# Altium PCB OUR_CIU.PcbDoc (part 1 of 2)
Units mil, origin at the board's own origin, x right, y up, seen from the top; angles counter-clockwise.
Board outline 2638.36 x 2031.63 mil, 4 copper layers (Signal, Top Ground, Power, Bottom Ground), stack 23.756 mil thick; 81 components, 38 nets, 261 pads, 83 vias.
Unrouted connection lines stored in the file: 31.
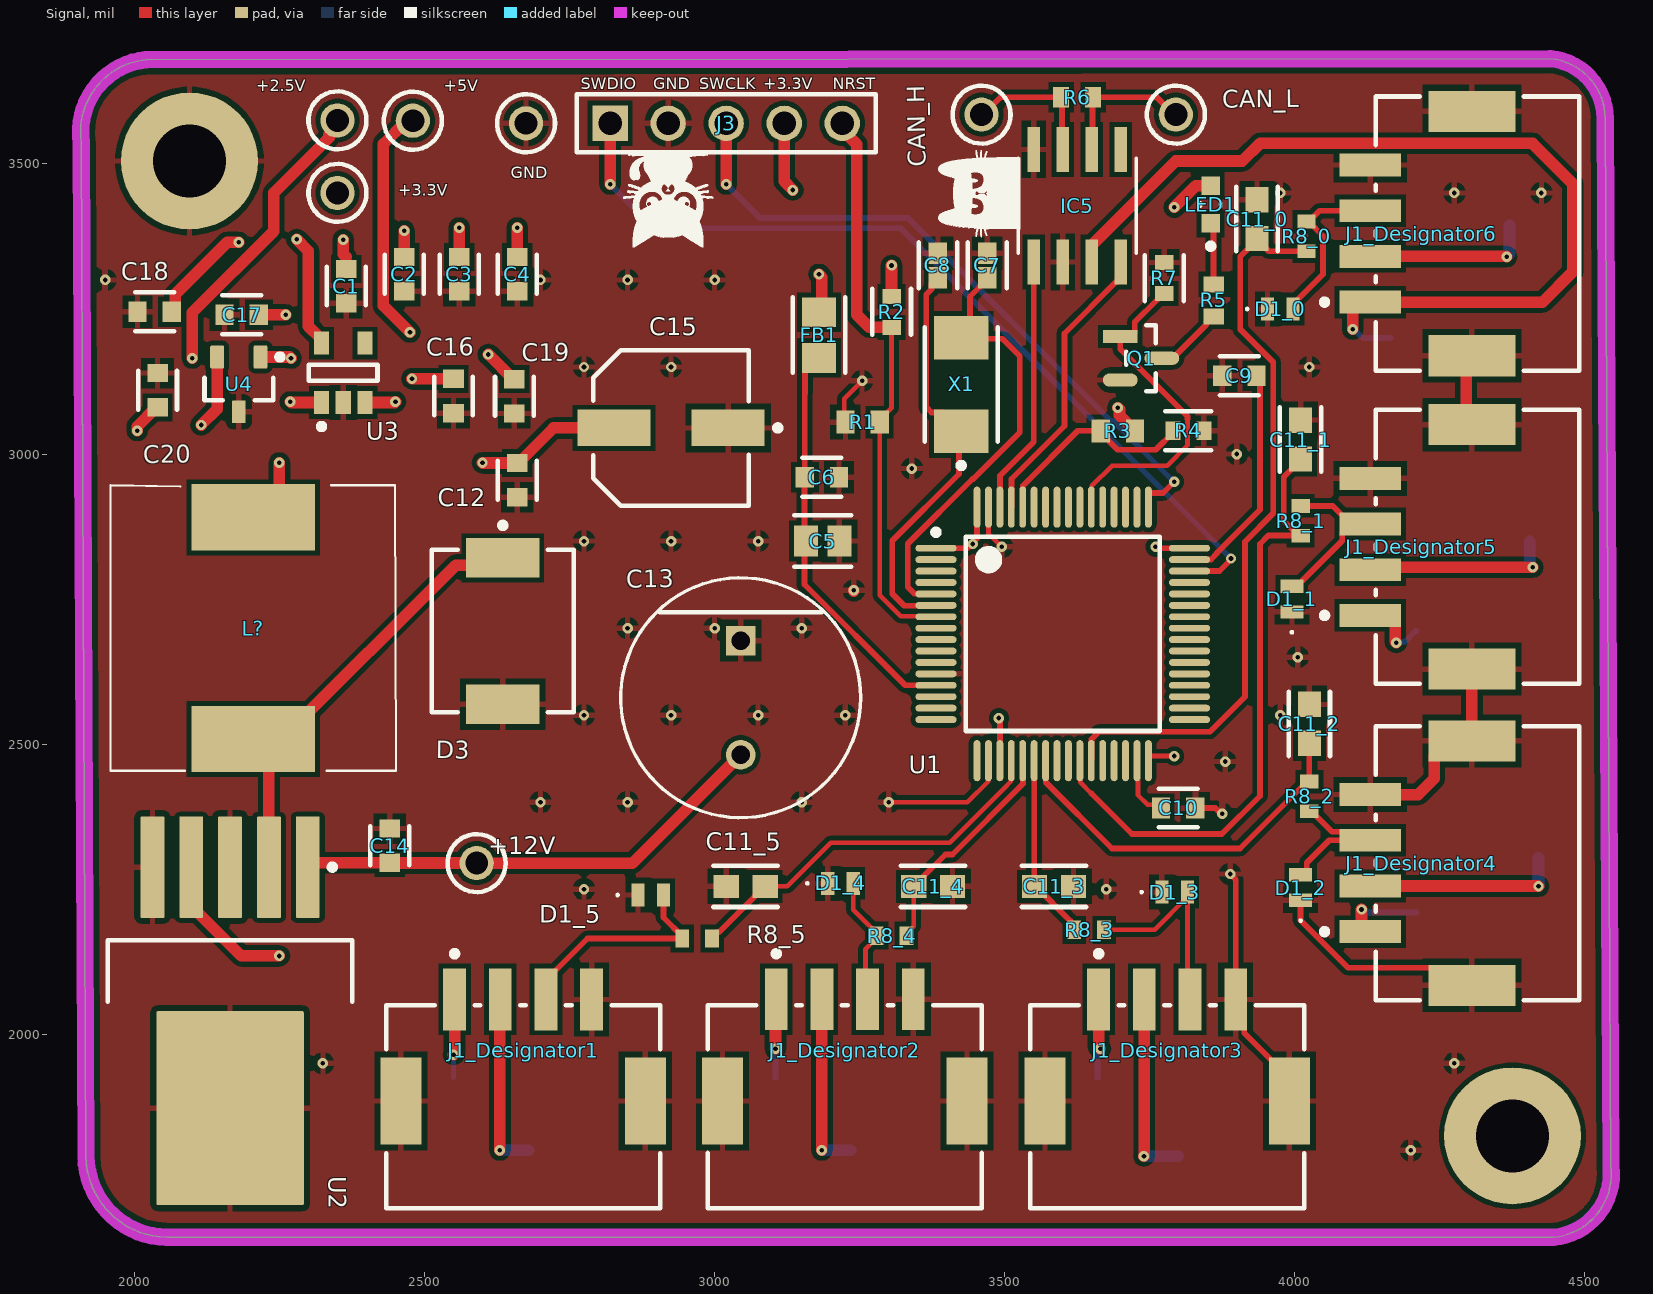
[diagram p0: Signal view]
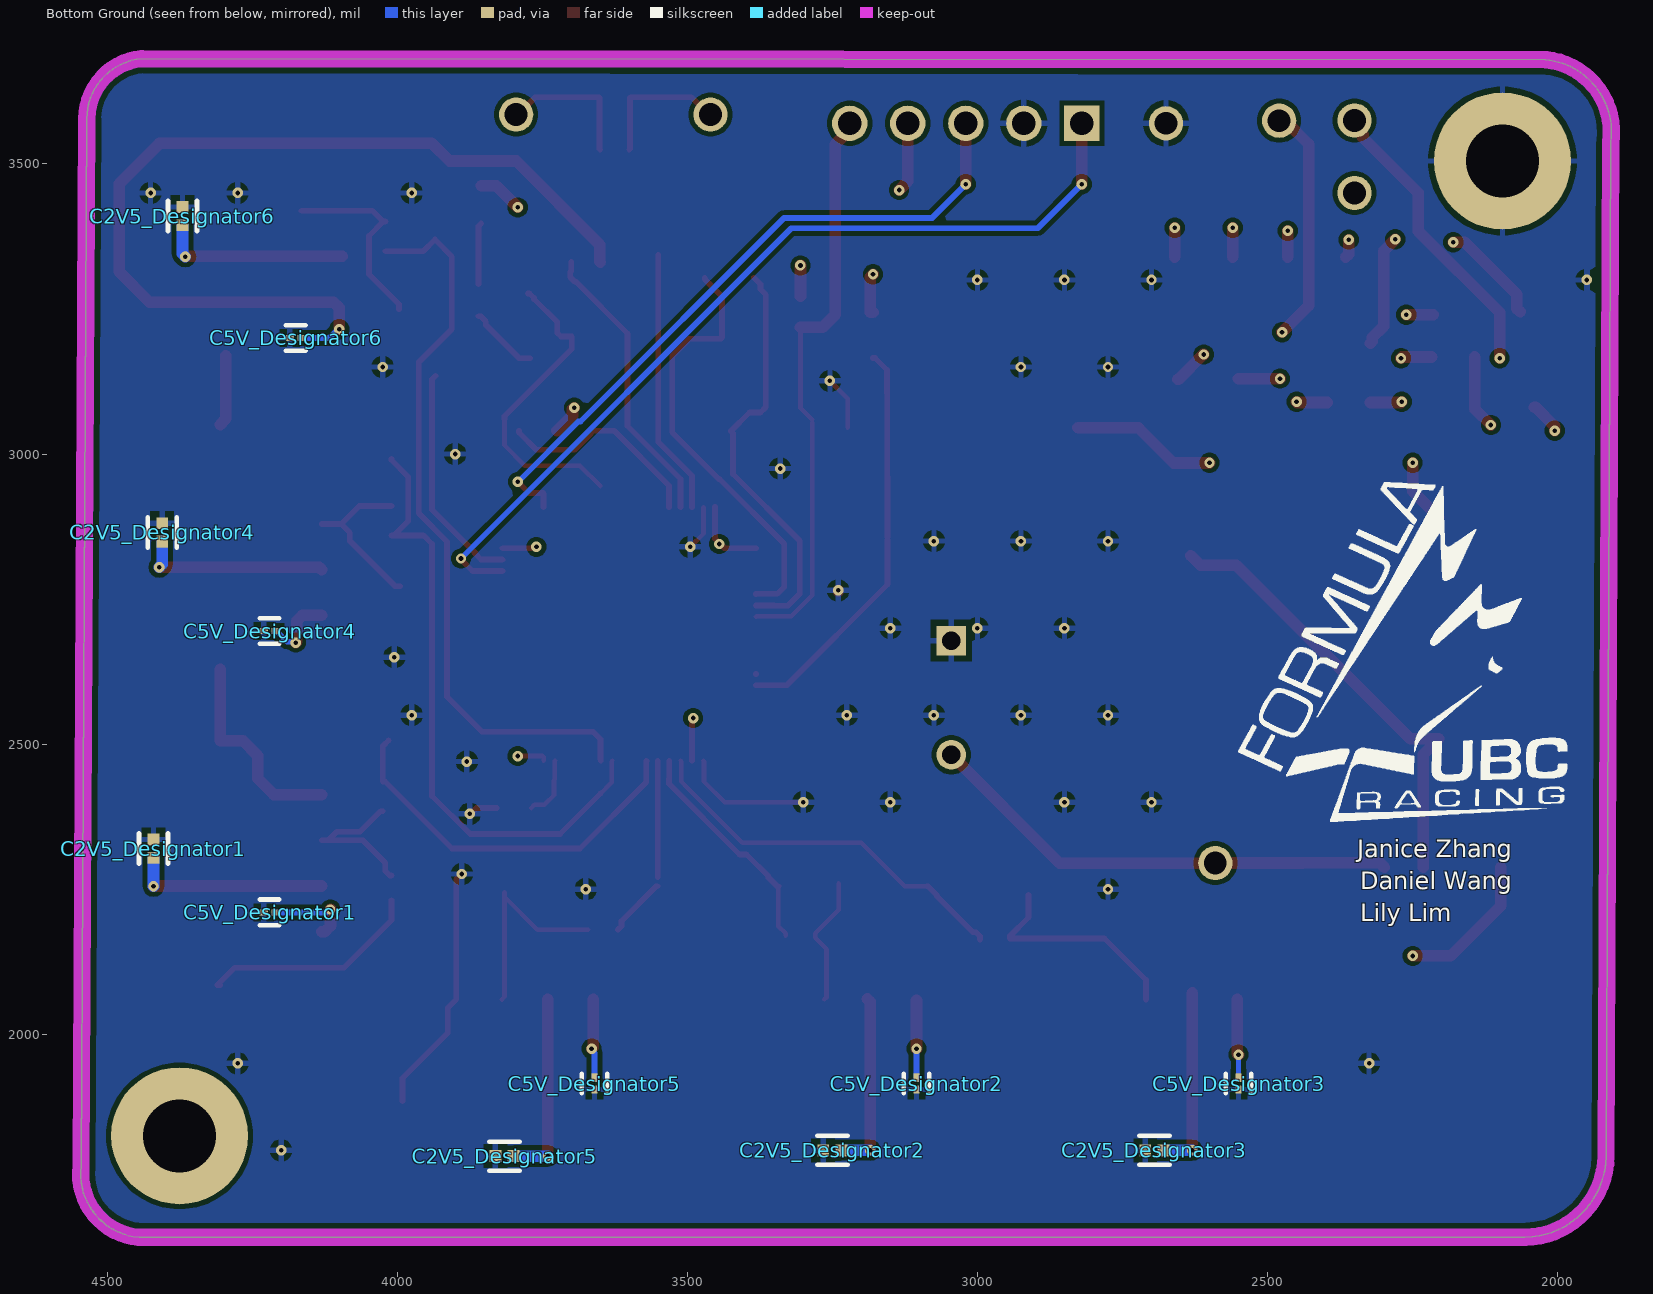
[diagram p1: Bottom Ground view, seen from below]
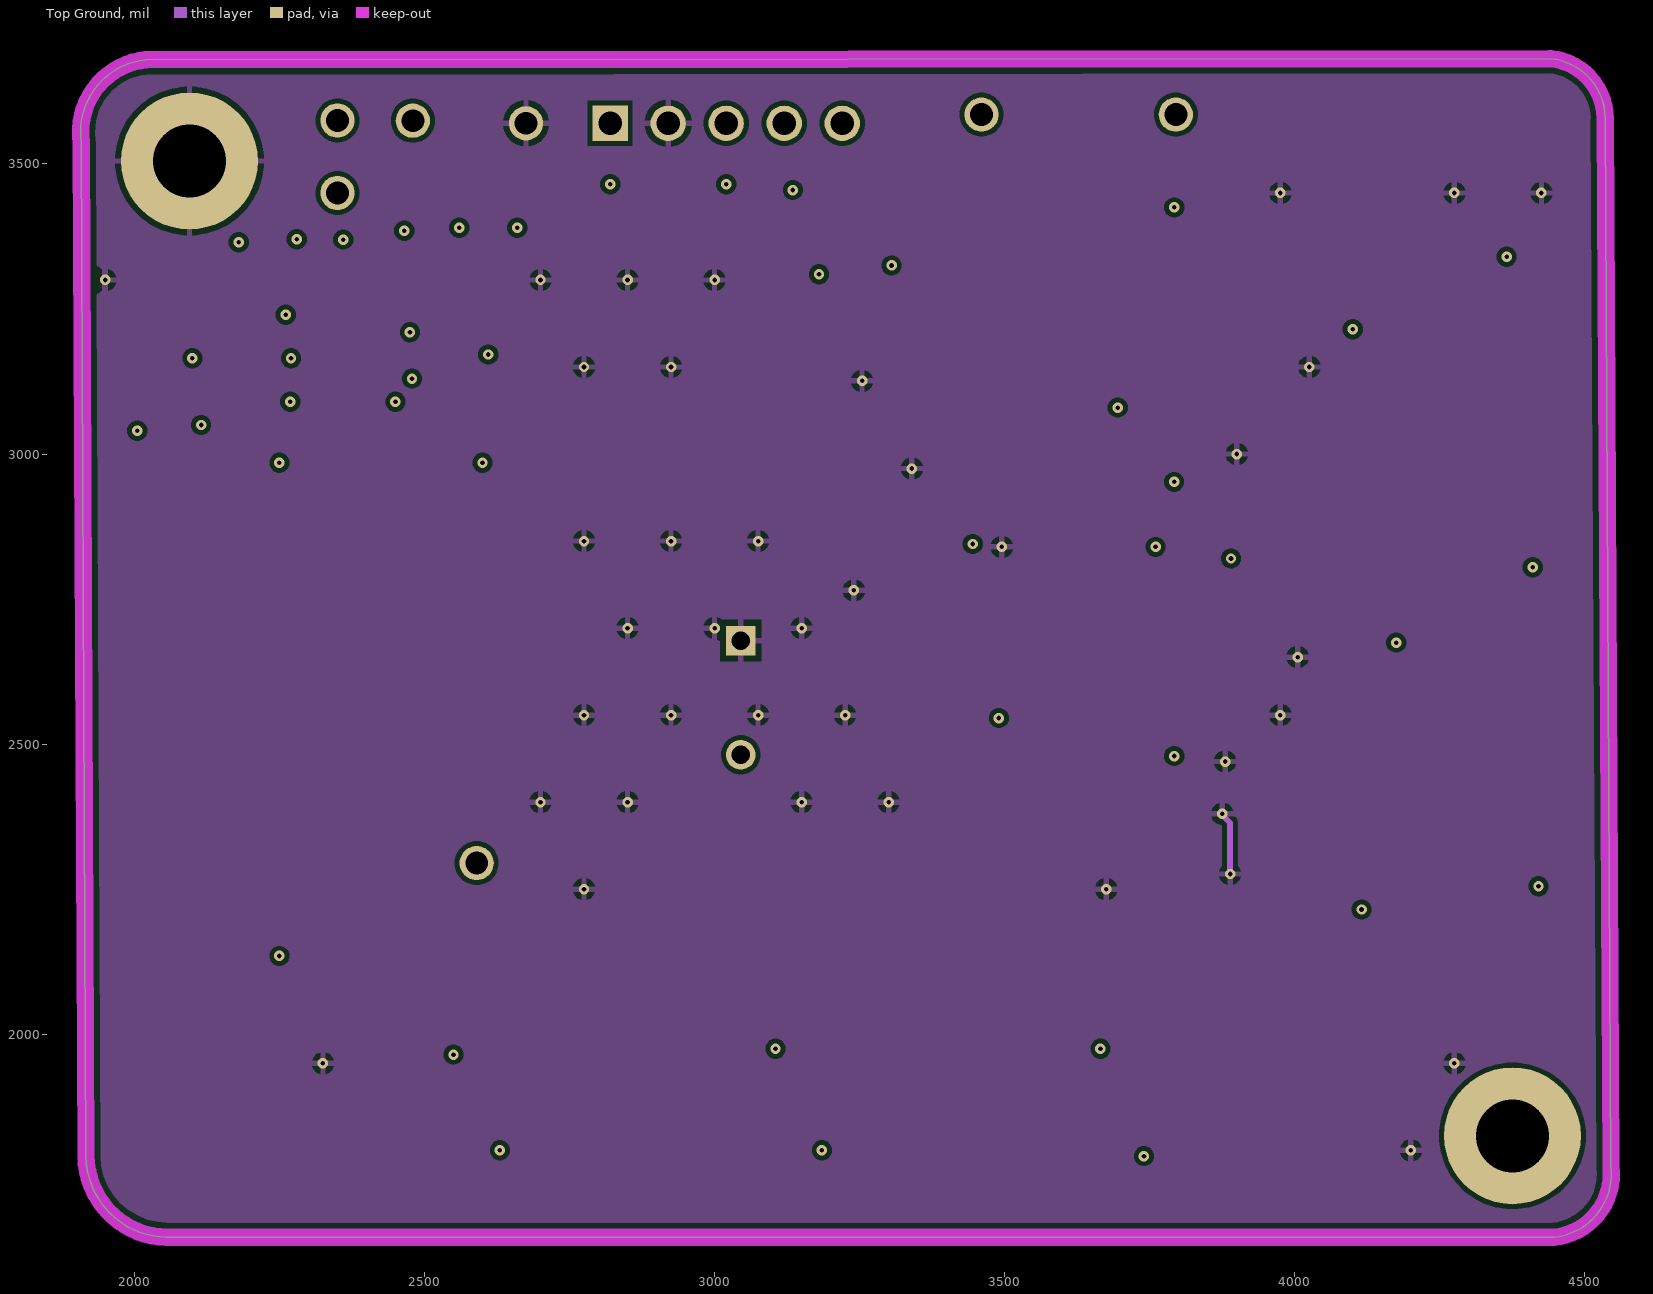
[diagram p2: Top Ground]
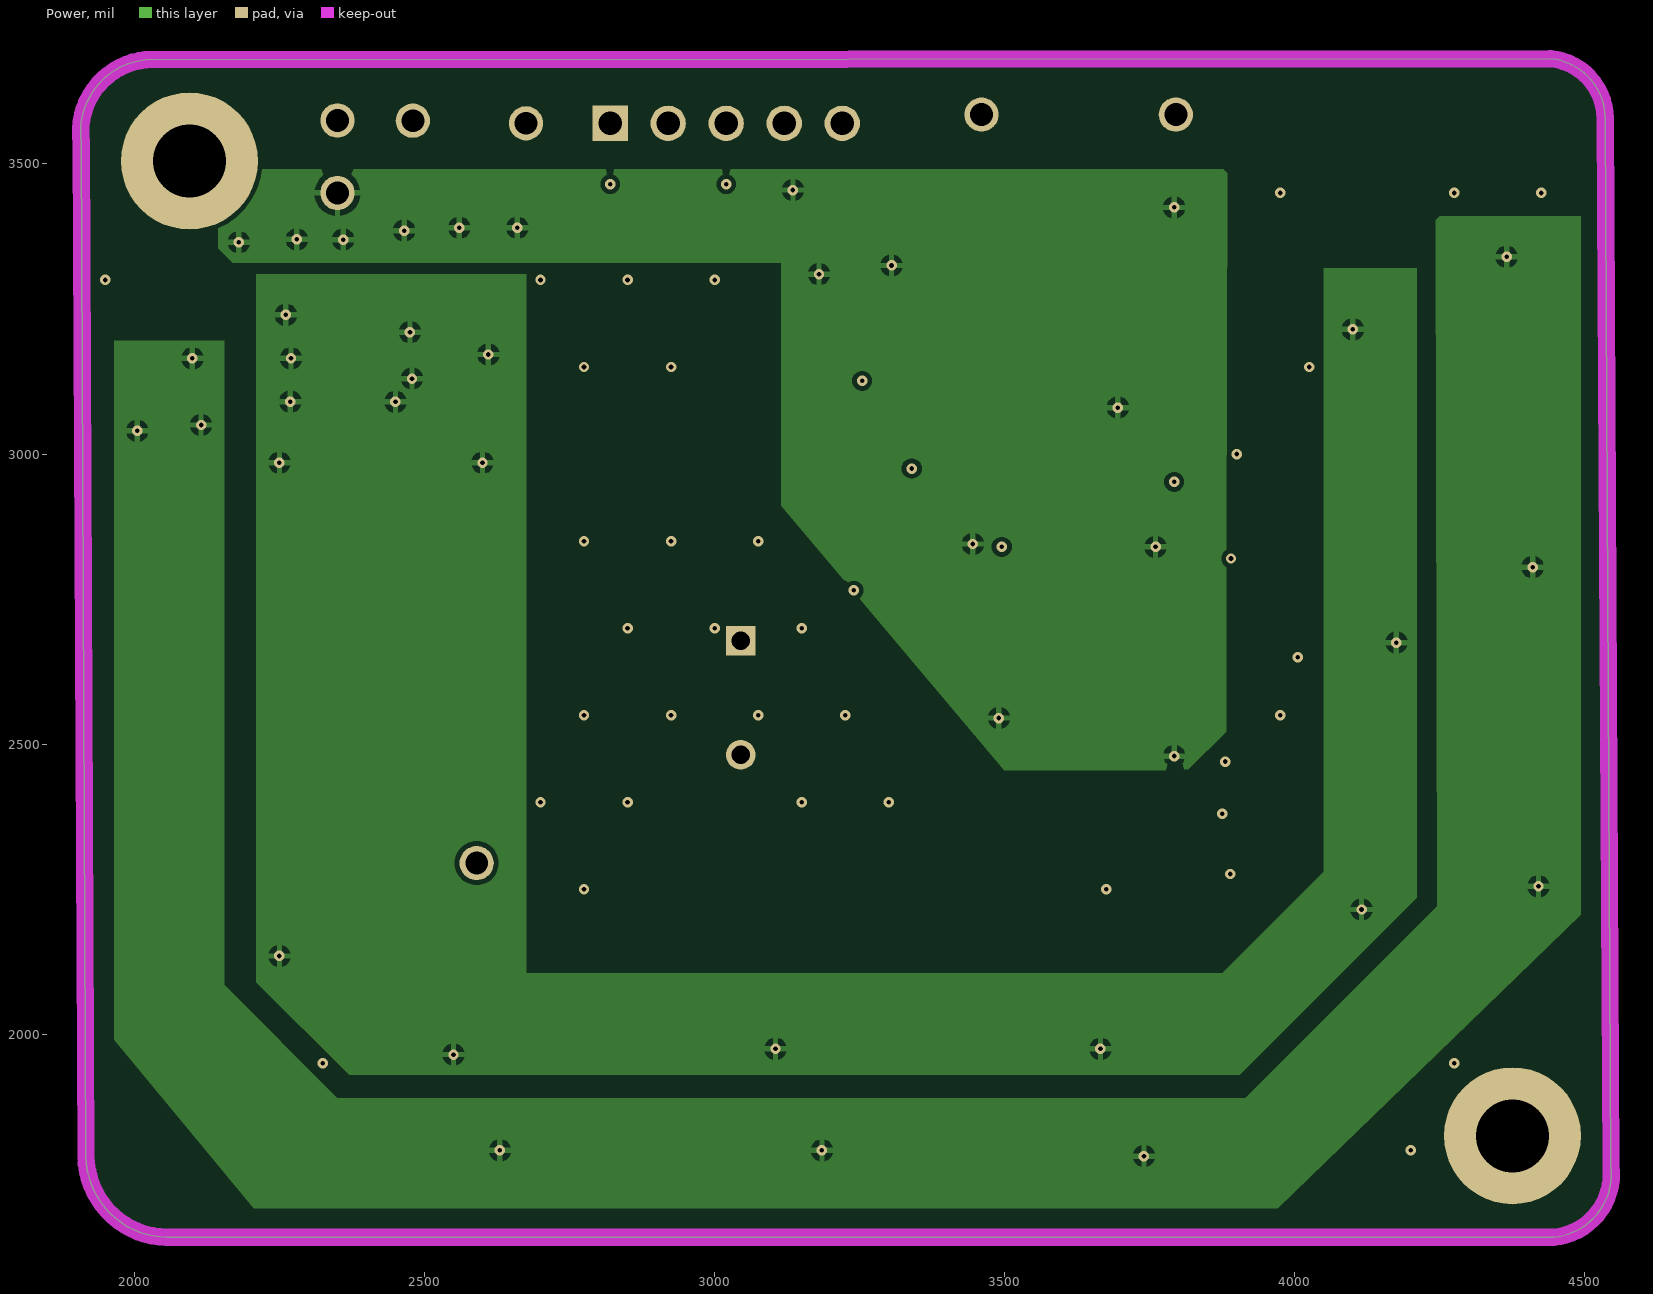
[diagram p3: Power]
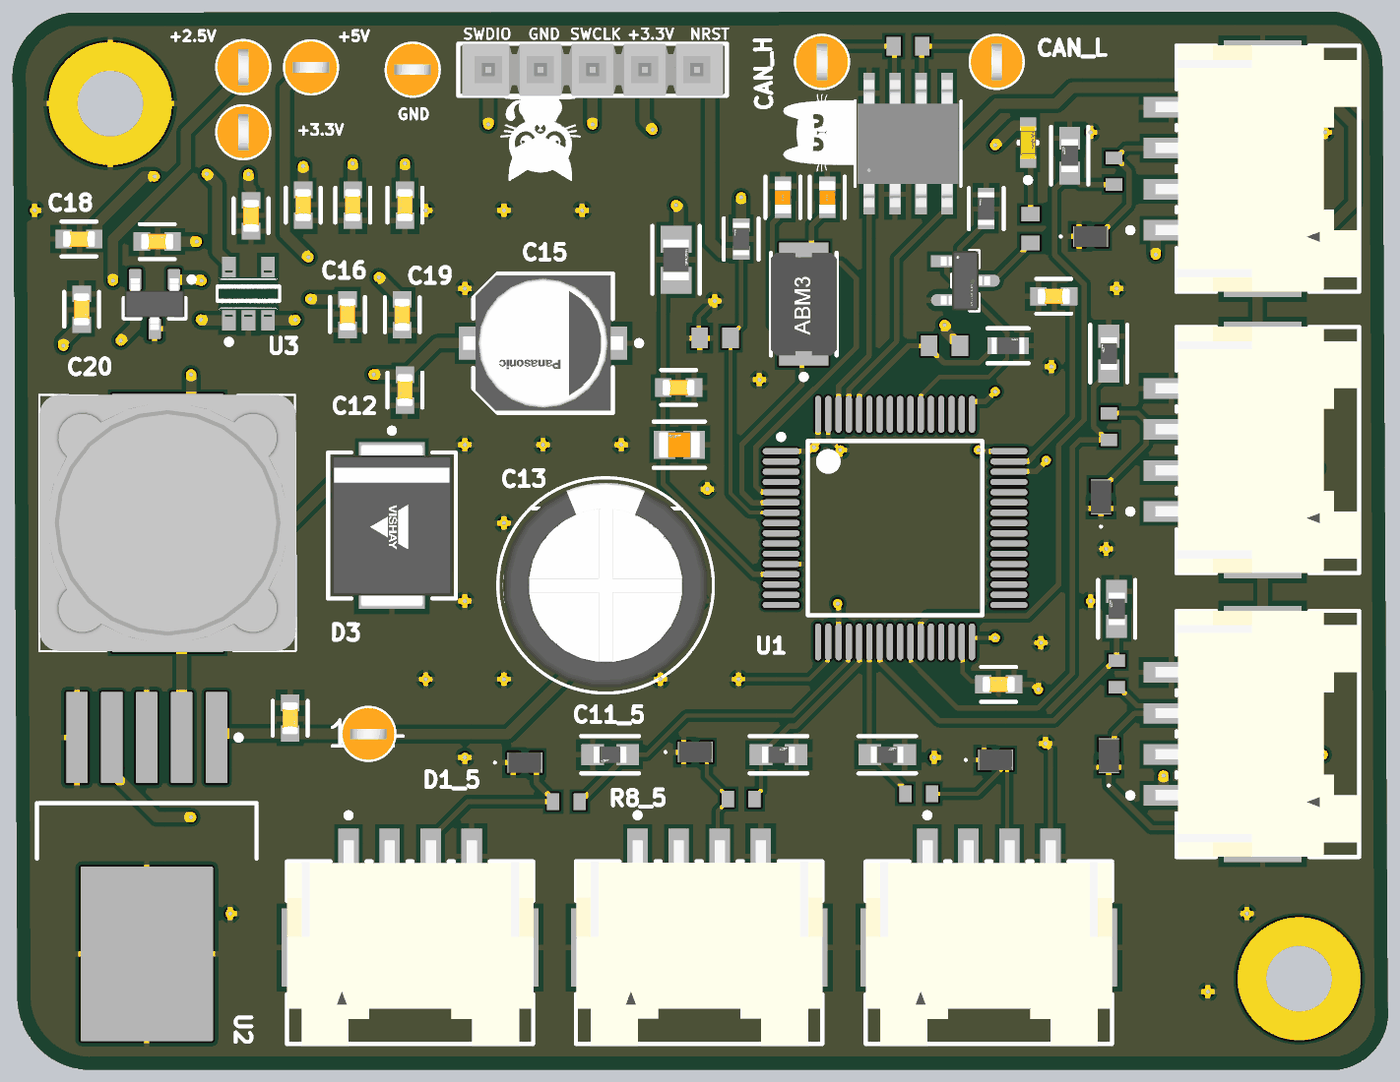
[diagram p4: 3D render of the assembled board from above, using the file's embedded part models]
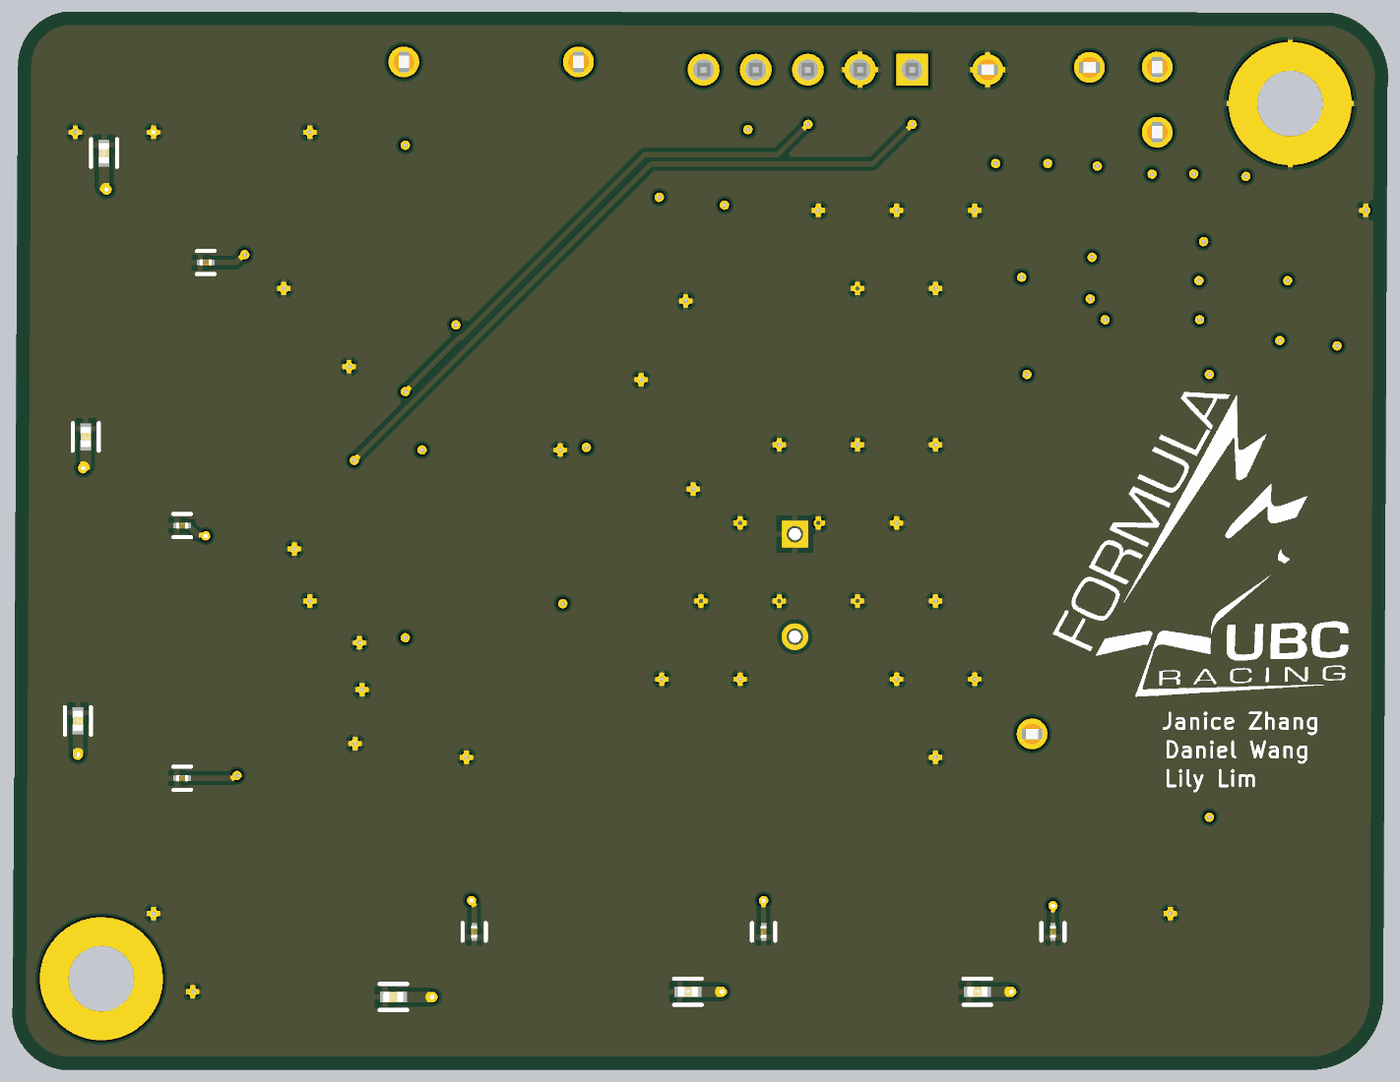
[diagram p5: 3D render of the assembled board from below, using the file's embedded part models]

## Layer stack, top to bottom
Top Solder: solder mask 0.4, Solder Resist, Dk 3.5
Signal: signal copper 1.378
Dielectric 2: prepreg 2.8, PP-006, Dk 4.1
Top Ground: signal copper 1.4
Dielectric 1: dielectric 12.6, FR-4, Dk 4.8
Power: signal copper 1.4
Dielectric 3: prepreg 2.8, PP-006, Dk 4.1
Bottom Ground: signal copper 1.378
Bottom Solder: solder mask 0.4, Solder Resist, Dk 3.5

## Board outline
1916.66,1789.42 ccw(c2058.37,1791.64) 2056.15,1649.94 4445.7,1649.94 ccw(c4435.59,1759.58) 4544.91,1772.68 4534.95,3578.28 ccw(c4430.63,3577.71) 4440.43,3681.57 2020,3679.5 ccw(c2032.49,3554.83) 1908.56,3536.44

## Design rules (kind name [scope] priority, off if disabled: settings)
AssemblyTestPointUsage [All] p1: isadvanced=TRUE
AssemblyTestpoint [All] p1: isadvanced=TRUE testpointundercomponent=TRUE minsize=40 maxsize=100 preferedsize=60 minholesize=0 maxholesize=40 preferedholesize=32 testpointgrid=1 usegrid=TRUE gridtolerance=0.01 allowsidetop=TRUE allowsidebottom=TRUE
BoardOutlineClearance BoardOutlineClearance_1 [All] p1: isadvanced=TRUE gap=9 ignorepadtopadclearanceinfootprint=FALSE
Clearance Clearance_1 [(ExistsOnLayer('Top Ground') Or ExistsOnLayer('Power')) vs (ExistsOnLayer('Top Ground') Or ExistsOnLayer('Power'))] p1: gap=8 ignorepadtopadclearanceinfootprint=FALSE except(5: SMDPad-SMDPad; 10: Arc-THPad Arc-Via Track-THPad Track-Via THPad-Text Via-Text; 20: SMDPad-THPad THPad-THPad) sourcerule=43 cellrowname=All cellrowtype=0 cellcolname=All cellcoltype=0 innerlayers=TRUE
Clearance Clearance_2 [(ExistsOnLayer('Signal') Or ExistsOnLayer('Bottom Ground')) vs (ExistsOnLayer('Signal') Or ExistsOnLayer('Bottom Ground'))] p2: gap=8 ignorepadtopadclearanceinfootprint=FALSE except(5: SMDPad-SMDPad; 10: Arc-THPad Arc-Via Track-THPad Track-Via THPad-Text Via-Text; 20: SMDPad-THPad THPad-THPad) sourcerule=43 cellrowname=All cellrowtype=0 cellcolname=All cellcoltype=0 outerlayers=TRUE
Clearance [All] p3: gap=10 ignorepadtopadclearanceinfootprint=FALSE ismatrix=TRUE
ComponentClearance [All] p1: isadvanced=TRUE gap=10 collisioncheckmode=3 verticalgap=10 showdistances=FALSE
FabricationTestPointUsage [All] p1: isadvanced=TRUE valid=0 allowmultiple=FALSE
FabricationTestpoint [All] p1: isadvanced=TRUE side=3 testpointundercomponent=TRUE minsize=40 maxsize=100 preferedsize=60 minholesize=0 maxholesize=40 preferedholesize=32 testpointgrid=1 allowsidetop=TRUE allowsidebottom=TRUE usegrid=TRUE gridtolerance=0.01
FanoutControl Fanout_BGA [IsBGA] p1: isadvanced=TRUE bgadir=Out bgaviamode=Centered fanoutstyle=Auto fanoutdirection=Alternating viagrid=1 // Fanout_BGA (Default Rule)
FanoutControl Fanout_LCC [IsLCC] p2: isadvanced=TRUE bgadir=Out bgaviamode=Centered fanoutstyle=Auto fanoutdirection=Alternating viagrid=1 // Fanout_LCC (Default Rule)
FanoutControl Fanout_SOIC [IsSOIC] p3: isadvanced=TRUE bgadir=Out bgaviamode=Centered fanoutstyle=Auto fanoutdirection=Alternating viagrid=1 // Fanout_SOIC (Default Rule)
FanoutControl Fanout_Small [(CompPinCount < 5)] p4: isadvanced=TRUE bgadir=Out bgaviamode=Centered fanoutstyle=Auto fanoutdirection=OutThenIn viagrid=1 // Fanout_Small (Default Rule)
FanoutControl Fanout_Default [All] p5: isadvanced=TRUE bgadir=Out bgaviamode=Centered fanoutstyle=Auto fanoutdirection=Alternating viagrid=1 // Fanout_Default (Default Rule)
Height [All] p1: isadvanced=TRUE minheight=0 maxheight=1000 prefheight=500
HoleSize [All] p1: isadvanced=TRUE absolutevalues=TRUE maxlimit=200 minlimit=1 maxpercent=80.000 minpercent=20.000
HoleToHoleClearance [All] p1: isadvanced=TRUE gap=10 allowstackedmicrovias=TRUE
LayerPairs [All] p1: isadvanced=TRUE enforce=TRUE
MinimumSolderMaskSliver [All] p1: isadvanced=TRUE minsoldermaskwidth=5
NetAntennae [All] p1: isadvanced=TRUE netantennaetolerance=0
PasteMaskExpansion [All] p1: isadvanced=TRUE expansion=0
PlaneClearance [All] p1: isadvanced=TRUE clearance=20
PlaneConnect [All] p1: isadvanced=TRUE planeconnectstyle=Relief reliefexpansion=20 reliefentries=4 reliefconductorwidth=10 reliefairgap=10
PolygonConnect [All] p1: connectstyle=Relief reliefconductorwidth=10 reliefentries=4 polygonreliefangle="90 Angle" airgapwidth=10
RoutingCorners [All] p1: isadvanced=TRUE cornerstyle=45-Degree minsetback=100 maxsetback=100
RoutingPriority [All] p1: isadvanced=TRUE routingpriority=0
RoutingVias [All] p1: holewidth=8 width=18 viastyle="Through Hole" minholewidth=8 minwidth=18 maxholewidth=28 maxwidth=50
ShortCircuit [All] p1: isadvanced=TRUE allowed=FALSE
SilkToSilkClearance [All] p1: isadvanced=TRUE silktosilkclearance=10
SilkToSolderMaskClearance [IsPad] p1: isadvanced=TRUE minsilkscreentomaskgap=10 clearancetoexposedcopper=TRUE
SolderMaskExpansion [All] p1: isadvanced=TRUE expansion=4 istentingtop=FALSE
SupplyNets "Schematic Supply Nets_5" [InNet('D+12V')] p1: isadvanced=TRUE voltage=0.000
SupplyNets "Schematic Supply Nets_4" [InNet('+2V5')] p2: isadvanced=TRUE voltage=0.000
SupplyNets "Schematic Supply Nets_3" [InNet('+5')] p3: isadvanced=TRUE voltage=0.000
SupplyNets "Schematic Supply Nets_1" [InNet('D+3.3V')] p4: isadvanced=TRUE voltage=0.000
SupplyNets "Schematic Supply Nets" [InNet('GND')] p5: isadvanced=TRUE voltage=0.000
UnRoutedNet [All] p1: isadvanced=TRUE
UnpouredPolygon [All] p1: isadvanced=TRUE
Width MaxMinWidth_1 [All] p1: isadvanced=TRUE maxlimit=20 minlimit=8 preferedwidth=10 midlayer1_minwidth=10 midlayer1_maxwidth=10 midlayer2_minwidth=10 midlayer2_maxwidth=10 minimp=50.000000 maximp=50.000000 favimp=50.000000
Width [All] p2 off: maxlimit=40 minlimit=10 preferedwidth=10 minimp=50.000000 maximp=50.000000 favimp=50.000000
4 further rules are at their usual default settings.

## Classes and differential pairs
channel class Connectors: Designator1 Designator2 Designator3 Designator4 Designator5 Designator6
component class Designator: +2.5V +3.3V +5V +12V C13 C14 C15 C16 C17 C18 C19 C20 D3 GND L? U2 U3 U4
component class Designator6: C2V5_Designator6 C5V_Designator6 J1_Designator6
component class Designator5: C2V5_Designator5 C5V_Designator5 J1_Designator5
component class Designator4: C2V5_Designator4 C5V_Designator4 J1_Designator4
component class Designator3: C2V5_Designator3 C5V_Designator3 J1_Designator3
component class Designator2: C2V5_Designator2 C5V_Designator2 J1_Designator2
component class Designator1: C2V5_Designator1 C5V_Designator1 J1_Designator1
channel class Input_Conditioner: 0 1 2 3 4 5
component class STlink: D5 J3
component class MCU: C1 C2 C3 C4 C5 C6 C7 C8 C9 C10 FB1 LED1 LED3 Q1 R1 R2 R3 R4 R5 R7 U1 X1
component class Can_Interface: C12 CAN_H CAN_L IC5 R6 R24
component class 5: C11_5 D1_5 D3_5 R8_5
component class 4: C11_4 D1_4 D3_4 R8_4
component class 3: C11_3 D1_3 D3_3 R8_3
component class 2: C11_2 D1_2 D3_2 R8_2
component class 1: C11_1 D1_1 D3_1 R8_1
component class 0: C11_0 D1_0 D3_0 R8_0

## Components (designator, comment, footprint, x,y, rotation, side; value= is the part's Value field where it differs from the comment)
+2.5V "5003" KSTN-5003 2350,3575 r90 top (schematic designator +2V5)
+3.3V "5003" KSTN-5003 2350,3450 r90 top
+5V "5003" KSTN-5003 2480,3574.47 r0 top (schematic designator +5)
+12V "5003" KSTN-5003 2590,2295 r0 top (schematic designator 12+)
C1 "0.1uF" FP-CC0603-DA-MFG 2365,3289.53 r270 top value="100 nF"
C2 "0.1uF" FP-CC0603-DA-MFG 2465,3310 r270 top value="100 nF"
C2V5_Designator1 "C0402C105K9PACTU" FP-C0402C105K9PACTU-MFG 4420,2320 r90 bottom (schematic designator C2V5)
C2V5_Designator2 "C0402C105K9PACTU" FP-C0402C105K9PACTU-MFG 3250,1800 r0 bottom (schematic designator C2V5)
C2V5_Designator3 "C0402C105K9PACTU" FP-C0402C105K9PACTU-MFG 2695,1800 r0 bottom (schematic designator C2V5)
C2V5_Designator4 "C0402C105K9PACTU" FP-C0402C105K9PACTU-MFG 4405,2865 r90 bottom (schematic designator C2V5)
C2V5_Designator5 "C0402C105K9PACTU" FP-C0402C105K9PACTU-MFG 3815,1790 r0 bottom (schematic designator C2V5)
C2V5_Designator6 "C0402C105K9PACTU" FP-C0402C105K9PACTU-MFG 4370,3410 r90 bottom (schematic designator C2V5)
C3 "0.1uF" FP-CC0603-DA-MFG 2560,3310 r270 top value="100 nF"
C4 "0.1uF" FP-CC0603-DA-MFG 2660,3310 r270 top value="100 nF"
C5 "10uF" FP-GRM21B-0_2-e0_2_0_7-IPC_C 3186.43,2850 r180 top
C5V_Designator1 "GRM033R61A104KE15D" FP-GRM033-0_03-IPC_C 4220.01,2210 r0 bottom (schematic designator C5V)
C5V_Designator2 "GRM033R61A104KE15D" FP-GRM033-0_03-IPC_C 3105,1915 r270 bottom (schematic designator C5V)
C5V_Designator3 "GRM033R61A104KE15D" FP-GRM033-0_03-IPC_C 2550,1915 r270 bottom (schematic designator C5V)
C5V_Designator4 "GRM033R61A104KE15D" FP-GRM033-0_03-IPC_C 4219.99,2695 r0 bottom (schematic designator C5V)
C5V_Designator5 "GRM033R61A104KE15D" FP-GRM033-0_03-IPC_C 3660,1915 r270 bottom (schematic designator C5V)
C5V_Designator6 "GRM033R61A104KE15D" FP-GRM033-0_03-IPC_C 4175,3200 r0 bottom (schematic designator C5V)
C6 "1uF" FP-CC0603-DA-MFG 3185,2960 r180 top value="1 uF"
C7 "8pF" FP-C1608-080-0_1-IPC_C 3470,3325 r90 top
C8 "8pF" FP-C1608-080-0_1-IPC_C 3385,3325 r90 top
C9 "2u2" FP-CC0603-DA-MFG 3904.53,3135 r0 top value="2.2 uF"
C10 "2u2" FP-CC0603-DA-MFG 3798.78,2390 r180 top value="2.2 uF"
C11_0 "Capacitor" FP-RC1608-IPC_A 3935,3405 r90 top value=DNP (schematic designator C11)
C11_1 "Capacitor" FP-RC1608-IPC_A 4010,3025 r90 top value=DNP (schematic designator C11)
C11_2 "Capacitor" FP-RC1608-IPC_A 4025,2535 r90 top value=DNP (schematic designator C11)
C11_3 "Capacitor" FP-RC1608-IPC_A 3585,2255 r0 top value=DNP (schematic designator C11)
C11_4 "Capacitor" FP-RC1608-IPC_A 3376.49,2255 r0 top value=DNP (schematic designator C11)
C11_5 "Capacitor" FP-RC1608-IPC_A 3053.51,2255 r180 top value=DNP (schematic designator C11)
C12 "CC0603MRX7R9BB104" FP-CC0603-DA-MFG 2660,2955 r270 top value="100 nF"
C13 "EEUHD1H471B" FP-RAD-TH-D_10_0_5-L_20_2-MFG 3045,2580 r270 top
C14 "CC0603MRX7R9BB104" FP-CC0603-DA-MFG 2440,2325 r90 top value="100 nF"
C15 "EEEFK1C221XP" FP-FKD8-MFG 2925,3045 r180 top
C16 "CC0603MRX7R9BB104" FP-CC0603-DA-MFG 2550,3100 r270 top value="100 nF"
C17 "CC0603KPX7R7BB105" FP-CC0603-DA-MFG 2185,3240 r180 top value="1 uF"
C18 "CC0603KPX7R7BB105" FP-CC0603-DA-MFG 2035,3245 r180 top value="1 uF"
C19 "CC0603KPX7R7BB105" FP-CC0603-DA-MFG 2655,3099.53 r270 top value="1 uF"
C20 "CC0603MRX7R9BB104" FP-CC0603-DA-MFG 2040,3110 r90 top value="100 nF"
CAN_H "5003" KSTN-5003 3460,3585 r90 top
CAN_L "5003" KSTN-5003 3795,3585 r90 top
D1_0 "SC1103C-01UTG" SC1103C01UTG 3975,3250 r0 top (schematic designator D1)
D1_1 "SC1103C-01UTG" SC1103C01UTG 3995,2750 r90 top (schematic designator D1)
D1_2 "SC1103C-01UTG" SC1103C01UTG 4010,2252.95 r90 top (schematic designator D1)
D1_3 "SC1103C-01UTG" SC1103C01UTG 3792.95,2245 r0 top (schematic designator D1)
D1_4 "SC1103C-01UTG" SC1103C01UTG 3217.05,2260 r0 top (schematic designator D1)
D1_5 "SC1103C-01UTG" SC1103C01UTG 2890,2240 r0 top (schematic designator D1)
D3 "SS34-E3/9AT" FP-SMC-MFG 2635,2695 r270 top
FB1 "ferrite bead 0805" FP-RC2012-IPC_A 3180,3205 r90 top
GND "5003" KSTN-5003 2675,3570 r0 top
IC5 "ATA6560-GAQW-N" SOIC8_4P9X3P9MC_MCH 3625,3428 r90 top
J1_Designator1 "SM04B-PASS-TBT(LF)(SN)" FP-SM04B-PASS-TBT_LF_SN-MFG 2670,1875 r180 top (schematic designator J1)
J1_Designator2 "SM04B-PASS-TBT(LF)(SN)" FP-SM04B-PASS-TBT_LF_SN-MFG 3224.37,1875.16 r180 top (schematic designator J1)
J1_Designator3 "SM04B-PASS-TBT(LF)(SN)" FP-SM04B-PASS-TBT_LF_SN-MFG 3780,1875 r180 top (schematic designator J1)
J1_Designator4 "SM04B-PASS-TBT(LF)(SN)" FP-SM04B-PASS-TBT_LF_SN-MFG 4315,2295 r270 top (schematic designator J1)
J1_Designator5 "SM04B-PASS-TBT(LF)(SN)" FP-SM04B-PASS-TBT_LF_SN-MFG 4315.04,2839.96 r270 top (schematic designator J1)
J1_Designator6 "SM04B-PASS-TBT(LF)(SN)" FP-SM04B-PASS-TBT_LF_SN-MFG 4315,3380 r270 top (schematic designator J1)
J3 "TSW-105-05-G-S" SMTC-TSW-105-05-X-S 2820,3570 r0 top
L? "SRR1260-101M" SRR1260101M 2205,2700 r90 top
LED1 "APT1608LZGCK" FP-APT1608LZGCK-MFG 3855,3430 r90 top
Q1 "BSS138" FP-318-08-IPC_B 3735,3165 r0 top
R1 "0" RESC1608X55X25ML10T15 3255,3055 r0 top
R2 "10k" FP-RC0603-0_55-IPC_C 3305,3245 r90 top
R3 "0" RESC1608X55X25ML10T15 3695,3040 r180 top
R4 "10k" FP-RC0603-0_55-IPC_C 3816.64,3040 r0 top
R5 "330" RESC1608X55X25NL10T15 3860,3265 r90 top
R6 "RC0603FR-07120RL" RESC1608X55X25NL10T15 3625,3615 r180 top
R7 "10k" FP-RC0603-0_55-IPC_C 3775,3303.36 r90 top
R8_0 "340" RESC1608X55X25LL10T15 4020,3375 r270 top (schematic designator R8)
R8_1 "340" RESC1608X55X25LL10T15 4010,2885 r270 top (schematic designator R8)
R8_2 "340" RESC1608X55X25LL10T15 4025,2410 r90 top (schematic designator R8)
R8_3 "340" RESC1608X55X25LL10T15 3645.59,2180 r180 top (schematic designator R8)
R8_4 "340" RESC1608X55X25LL10T15 3305,2170 r0 top (schematic designator R8)
R8_5 "340" RESC1608X55X25LL10T15 2970,2165 r0 top (schematic designator R8)
U1 "STM32F405RGT7" STM-LQFP64_N 3600,2690 r0 top
U2 "LM2596S-5.0/NOPB" KTT0005B_M 2165,2040 r270 top
U3 "MIC5504-3.3YM5-TR" FP-SOT23-5LD-PL-1-MFG 2360,3140 r90 top
U4 "REF3325AIDBZR" DBZ0003A_N 2180,3120 r270 top
X1 "8 MHz" ABRA-ABM3-2_V 3425,3120 r90 top

## Footprints (in the part's own frame and the unit in brackets; to place one, negate y for a bottom-side part, rotate by r counter-clockwise, add the part's x,y. Pads: shape width x height; smd on the part's side, far side on the other; paste and mask are expansions set on the pad)
ABRA-ABM3-2_V [mm] "SMD, 2-Leads, Body 5x3.2mm, Pitch 4.1mm"
  rect 1.9x2.4 smd: 1(-2.05,0) 2(2.05,0)
  silkscreen extent -3.67,-1.6 2.5,1.6, body extent -2.5,-1.6 2.5,1.6, height 1.3
DBZ0003A_N [mm] "SOT23, 3-Leads, Body 3.04x1.4mm, Pitch 0.95mm, IPC Medium Density"
  rrect17% 1x0.6 smd: 1(-1.2,0.95) 2(-1.2,-0.95) 3(1.2,0)
  silkscreen extent -1.32,-1.5 0.7,1.93, body extent -1.26,-1.46 1.26,1.46, height 0.96
FP-318-08-IPC_B [mm]
  rect 1.524x0.578 smd paste+0 mask+0: 1(-0.91,0.95)
  rrect100% 1.524x0.578 smd paste+0 mask+0: 2(-0.91,-0.95) 3(0.91,0)
  silkscreen extent -0.65,-1.45 0.65,1.45, body extent -1.92,-1.7 1.92,1.7, height 0.25
FP-APT1608LZGCK-MFG [mm]
  rect 0.8x0.8 smd paste+0 mask+0: 1(-0.825,0) 2(0.825,0)
  silkscreen extent -1.95,-0.45 0.05,0.45, body extent -1.33,-0.55 1.33,0.55, height 0.25
FP-C0402C105K9PACTU-MFG [mm]
  rect 0.52x0.52 smd paste+0 mask+0: 1(-0.4,0) 2(0.4,0)
  silkscreen extent -0.67,-0.64 0.67,0.64, body extent -0.5,-0.25 0.5,0.25, height 0.55
FP-C1608-080-0_1-IPC_C [mil]
  rect 36.66x31.97 smd paste+0 mask+0: 1(-21.28,0) 2(21.28,0)
  silkscreen extent -40,-33 40,33, body extent -44,-22 44,22, height 10
FP-CC0603-DA-MFG [mm]
  rect 0.8x0.9 smd paste+0 mask+0: 1(-0.75,0) 2(0.75,0)
  silkscreen extent -0.85,-0.85 0.85,0.85, body extent -1.35,-0.75 1.35,0.75, height 0.25
FP-FKD8-MFG [mm]
  rect 3.2x1.6 smd paste+0 mask+0: 1(-2.5,0) 2(2.5,0)
  silkscreen extent -4.8,-3.4 3.4,3.4, body extent -4.35,-3.65 4.35,3.65, height 0.25
FP-GRM21B-0_2-e0_2_0_7-IPC_C [mil]
  rect 41.52x53.39 smd paste+0 mask+0: 1(-28.57,0) 2(28.57,0)
  silkscreen extent -49,-44 49,44, body extent -53,-32 53,32, height 10
FP-GRM033-0_03-IPC_C [mil]
  rect 13.94x10.34 smd paste+0 mask+0: 1(-10.01,0) 2(10.01,0)
  silkscreen extent -17,-22 17,22, body extent -12,-6 12,6, height 13
FP-RAD-TH-D_10_0_5-L_20_2-MFG [mm]
  rect 1.3x1.3 hole 0.8 paste-2539.97 mask+0: 1(-2.5,0)
  round 1.3 hole 0.8 paste-2539.97 mask+0: 2(2.5,0)
  silkscreen extent -5.25,-5.25 5.25,5.25, body extent -5.35,-5.35 5.35,5.35, height 0.25
FP-RC0603-0_55-IPC_C [mil]
  rect 25.93x31.97 smd paste+0 mask+0: 1(-26.64,0) 2(26.64,0)
  silkscreen extent -40,-33 40,33, body extent -44,-22 44,22, height 10
FP-RC1608-IPC_A [mil]
  rect 43.69x39.85 smd paste+0 mask+0: 1(-33.51,0) 2(33.51,0)
  silkscreen extent -55,-36 55,36, body extent -75,-40 75,40, height 10
FP-RC2012-IPC_A [mil]
  rect 51.37x59.38 smd paste+0 mask+0: 1(-39.4,0) 2(39.4,0)
  silkscreen extent -65,-45 65,45, body extent -85,-49 85,49, height 10
FP-SM04B-PASS-TBT_LF_SN-MFG [mm]
  rect 1x2.7 smd paste+0 mask+0: 1(3,-4.7) 2(1,-4.7) 3(-1,-4.7) 4(-3,-4.7)
  rect 1.8x3.8 smd paste+0 mask+0: 5(-5.35,-0.25) 6(5.35,-0.25)
  silkscreen extent -6,-6.82 6,4.45, body extent -6.35,-6.15 6.35,4.55, height 0.25
FP-SMC-MFG [mm]
  rect 1.72x3.2 smd paste+0 mask+0: 1(-3.205,0) 2(3.205,0)
  silkscreen extent -4.75,-3.11 3.55,3.11, body extent -4.17,-3.21 4.17,3.21, height 0.25
FP-SOT23-5LD-PL-1-MFG [mm]
  rect 1x0.66 smd paste+0 mask+0: 1(-1.3,0.95) 2(-1.3,0) 3(-1.3,-0.95) 4(1.3,-0.95) 5(1.3,0.95)
  silkscreen extent -2.47,-1.5 0.35,1.5, body extent -1.9,-1.6 1.9,1.6, height 0.25
KSTN-5003 [mm] "Test Point, Through Hole, Dia 2.54mm"
  round 1.5 hole 1: 1(0,0)
  silkscreen extent -1.27,-1.27 1.27,1.27, body extent -1.27,-1.27 1.27,1.27, height 4.57
KTT0005B_M [mm] "DPAK, 5-Leads, Body 10.65x9.65mm, Pitch 1.7mm, IPC Low Density"
  rrect10% 4.45x1.05 smd: 1(-6.3,3.4) 2(-6.3,1.7) 3(-6.3,0) 4(-6.3,-1.7) 5(-6.3,-3.4)
  rrect2% 8.5x6.45 smd: 6(4.25,0)
  silkscreen extent -6.42,-5.35 -0.4,5.35, body extent -3.1,-5.32 6.55,5.33, height 4.83
RESC1608X55X25LL10T15 [mm] "Chip Resistor, 2-Leads, Body 1.60x0.80mm, IPC High Density"
  rect 0.6x0.8 smd: 1(-0.65,0) 2(0.65,0)
  body extent -0.85,-0.45 0.85,0.45, height 0.55
RESC1608X55X25ML10T15 [mm] "Chip Resistor, 2-Leads, Body 1.60x0.80mm, IPC Low Density"
  rect 0.8x1 smd: 1(-0.75,0) 2(0.75,0)
  body extent -0.85,-0.45 0.85,0.45, height 0.55
RESC1608X55X25NL10T15 [mm] "Chip Resistor, 2-Leads, Body 1.70x0.90mm, IPC Medium Density"
  rect 0.7x0.9 smd: 1(-0.7,0) 2(0.7,0)
  body extent -0.85,-0.45 0.85,0.45, height 0.55
SC1103C01UTG [mm]
  rect 0.58x1 smd: 1(-0.56,0) 2(0.56,0)
  silkscreen extent -1.5,-0.05 -1.4,0.05, body extent -0.8,-0.5 0.8,0.5, height 0.51
SMTC-TSW-105-05-X-S [mm] ".025 SQ Post Terminal Strip Assembly, 1x5 Pins, Vertical, 2.54mm Pitch, Male"
  rect 1.55x1.55 hole 1.02: 1(0,0)
  round 1.55 hole 1.02: 2(2.54,0) 3(5.08,0) 4(7.62,0) 5(10.16,0)
  silkscreen extent -1.46,-1.27 11.62,1.27, body extent -1.27,-1.27 11.43,1.27, height 5.21
SOIC8_4P9X3P9MC_MCH [mil]
  rect 78x22 smd paste+0 mask+0: 1(-97,75) 2(-97,25) 3(-97,-25) 4(-97,-75) 5(97,-75) 6(97,-25) 7(97,25) 8(97,75)
  silkscreen extent -82,-102 82,102, body extent -122,-96 122,96, height 69
SRR1260101M [mm]
  rect 2.9x5.4 smd: 1(-4.85,0) 2(4.85,0)
  silkscreen extent -6.25,-6.25 6.25,6.25, body extent -6.25,-6.25 6.25,6.25, height 6
STM-LQFP64_N [mm] "Thin QFP, 64-Leads, Body 10x10mm, Pitch 0.5mm, IPC Medium Density"
  oval 1.8x0.3 smd: 1(-5.55,3.75) 2(-5.55,3.25) 3(-5.55,2.75) 4(-5.55,2.25) 5(-5.55,1.75) 6(-5.55,1.25) 7(-5.55,0.75) 8(-5.55,0.25) 9(-5.55,-0.25) 10(-5.55,-0.75) 11(-5.55,-1.25) 12(-5.55,-1.75) 13(-5.55,-2.25) 14(-5.55,-2.75) 15(-5.55,-3.25) 16(-5.55,-3.75) 33(5.55,-3.75) 34(5.55,-3.25) 35(5.55,-2.75) 36(5.55,-2.25) 37(5.55,-1.75) 38(5.55,-1.25) 39(5.55,-0.75) 40(5.55,-0.25) 41(5.55,0.25) 42(5.55,0.75) 43(5.55,1.25) 44(5.55,1.75) 45(5.55,2.25) 46(5.55,2.75) 47(5.55,3.25) 48(5.55,3.75)
  oval 0.3x1.8 smd: 17(-3.75,-5.55) 18(-3.25,-5.55) 19(-2.75,-5.55) 20(-2.25,-5.55) 21(-1.75,-5.55) 22(-1.25,-5.55) 23(-0.75,-5.55) 24(-0.25,-5.55) 25(0.25,-5.55) 26(0.75,-5.55) 27(1.25,-5.55) 28(1.75,-5.55) 29(2.25,-5.55) 30(2.75,-5.55) 31(3.25,-5.55) 32(3.75,-5.55) 49(3.75,5.55) 50(3.25,5.55) 51(2.75,5.55) 52(2.25,5.55) 53(1.75,5.55) 54(1.25,5.55) 55(0.75,5.55) 56(0.25,5.55) 57(-0.25,5.55) 58(-0.75,5.55) 59(-1.25,5.55) 60(-1.75,5.55) 61(-2.25,5.55) 62(-2.75,5.55) 63(-3.25,5.55) 64(-3.75,5.55)
  silkscreen extent -5.67,-4.25 4.25,4.57, body extent -5,-5 5,5, height 1.6

## Part data
+2.5V +3.3V +5V +12V CAN_H CAN_L GND: library part CMP-002-00037-2, "Test Point, Orange, Height 4.6 mm, Tail Length 3 mm, 1-Pin THD, RoHS", Colour=Orange, Manufacturer=Keystone, Package Description="1-Pin Through Hole Device, Dia 2.54 mm", Package Quantity=10, Case/Package=5003, Connector Type=TestPoint, Contact Material=Bronze, Contact Plating=Tin, Datasheet URL=http://keyelco.com/userAssets/file/M65p56.pdf, Datasheet Version=Jun-15, Diameter=2.54mm, Manufacturer URL=http://www.keyelco.com/, Mounting Technology=TH, Package Reference=5003, Packaging=Bulk, Pins=1, RoHS Compliant=True
C1 C2 C3 C4: library part CMP-03422-000537-1, "CAP CER 0.1UF 50V X7R 0603", Capacitance="100 nF", Manufacturer=YAGEO, Manufacturer Part Number=CC0603MRX7R9BB104, Package=CC0603-DA, Temperature="-55°C to +125°C", Temperature Characteristic=X7R, Temperature Coefficient=15%, Temperature Range High=+125°C, Temperature Range Low=-55°C, Tolerance=0.2, Voltage="50 V", Automotive=No, Category=Cap, ComponentLink2Description=Datasheet, ComponentLink2URL=http://www.yageo.com/documents/recent/UPY-GPHC_X7R_6.3V-to-50V_18.pdf, Device Class L1="Passive Components", Device Class L2=Capacitors, Device Class L3="Ceramic Capacitors", Digikey Description="CAP CER 0.1UF 50V X7R 0603", Footprint Url=http://www.yageo.com/exep/pages/download/literatures/UPY-C_GEN_24.pdf, Height=0.9mm, Lead Free=Yes, Material=Ceramic, Mouser Description="Cap Ceramic 50V 20% +Tol 20% -Tol X7R 15% TC 0.1uF SMD 0603", Octopart=https://octopart.com/cc0603mrx7r9bb104-yageo-67308423, RoHS=TRUE, Voltage Rating="50 V"
C2V5_Designator1 C2V5_Designator2 C2V5_Designator3 C2V5_Designator4 C2V5_Designator5 C2V5_Designator6: library part CMP-2008-02075-2, "CAP CER 1UF 6.3V X5R 0402", Capacitance=1uF, Case Code (Imperial)=0402, Dielectric=X5R, Dielectric Material=Ceramic, Max Operating Temperature=85°C, Min Operating Temperature=-55°C, Package Quantity=1, Tolerance=10%, Voltage=6.3V, Case/Package=0402, Construction=Flat, Depth=0.5mm, Height=0.5mm, Lead Free="Lead Free", Lead Pitch=0.3mm, Length=1mm, Mount="Surface Mount", Number of Pins=2, Packaging="Tape and Reel", Radiation Hardening=No, REACH SVHC="No SVHC", RoHS Compliant=Yes, Series=C, Termination=SMD/SMT, Thickness=0.022inch, Voltage Rating=6.3V, Voltage Rating (DC)=6.3V, Width=0.02inch
C5: library part CMP-06035-007712-1, "Chip Multilayer Ceramic Capacitors for General Purpose, 0805, 10uF, X7R, 15%, 10%, 16V"
C5V_Designator1 C5V_Designator2 C5V_Designator3 C5V_Designator4 C5V_Designator5 C5V_Designator6: library part CMP-2010-01264-2, "Chip Multilayer Ceramic Capacitors for General Purpose, 0201, 0.10uF, X5R, 15%, 10%, 10V", Capacitance=100nF, Case Code (Imperial)=0201, Case Code (Metric)=0603, Dielectric=X5R, Max Operating Temperature=85°C, Min Operating Temperature=-55°C, Package Quantity=1, Tolerance=10%, Voltage=10V, Case/Package=0201, Depth=0.3mm, Height=0.3mm, Lead Free="Lead Free", Length=0.6mm, Mount="Surface Mount", Packaging="Tape and Reel", Radiation Hardening=No, REACH SVHC="No SVHC", Termination=SMD/SMT, Thickness=0.013inch, Voltage Rating=10V, Voltage Rating (DC)=10V, Weight=6E-06oz, Width=0.012inch
C6: library part CMP-03422-001047-1, "CC0603 1 uF X7R 10.00% 16 V", Capacitance="1 uF", Manufacturer=YAGEO, Manufacturer Part Number=CC0603KPX7R7BB105, Package=CC0603-DA, Temperature="-55°C to +125°C", Temperature Characteristic=X7R, Temperature Coefficient=15%, Temperature Range High=+125°C, Temperature Range Low=-55°C, Tolerance=0.1, Voltage="16 V", Automotive=No, Category=Cap, ComponentLink2Description=Datasheet, ComponentLink2URL=http://www.yageo.com/documents/recent/UPY-GPHC_X7R_6.3V-to-50V_18.pdf, Device Class L1="Passive Components", Device Class L2=Capacitors, Device Class L3="Ceramic Capacitors", Footprint Url=http://www.yageo.com/exep/pages/download/literatures/UPY-C_GEN_24.pdf, Height=0.9mm, Lead Free=Yes, Material=Ceramic, Mouser Description="Cap Ceramic 1uF 16V X7R 10% SMD 0603 125°C Paper T/R", Octopart=https://octopart.com/cc0603kpx7r7bb105-yageo-25629533, RoHS=TRUE, Voltage Rating="16 V"
C7 C8: library part CMP-08246-003474-1, "Multilayer Ceramic Capacitors 8pF ±0.5pF 50V NP0 SMD 0603", Case Code (Imperial)=0603, Case Code (Metric)=1608, Dielectric=C0G, Max Operating Temperature=150°C, Min Operating Temperature=-55°C, Package Quantity=4000, Voltage Rating=50V, Capacitance=8pF, Case/Package=0603, Features="High Temperature", Height=0.8mm, Lead Free="Lead Free", Length=0.063inch, Mount="Surface Mount", Packaging="Tape and Reel", RoHS Compliant=Yes, Series=C, Termination=SMD/SMT, Thickness=0.035inch, Voltage Rating (DC)=50V, Weight=7.1E-05oz, Width=0.031inch
C9 C10: library part CMP-03422-001238-1, "CAP CER 2.2UF 16V X7R 0603", Capacitance="2.2 uF", Manufacturer=YAGEO, Manufacturer Part Number=CC0603KRX7R7BB225, Package=CC0603-DA, Temperature="-55°C to +125°C", Temperature Characteristic=X7R, Temperature Coefficient=15%, Temperature Range High=+125°C, Temperature Range Low=-55°C, Tolerance=0.1, Voltage="16 V", Automotive=No, Category=Cap, ComponentLink2Description=Datasheet, ComponentLink2URL=http://www.yageo.com/documents/recent/UPY-GPHC_X7R_6.3V-to-50V_18.pdf, Device Class L1="Passive Components", Device Class L2=Capacitors, Device Class L3="Ceramic Capacitors", Digikey Description="CAP CER 2.2UF 16V X7R 0603", Footprint Url=http://www.yageo.com/exep/pages/download/literatures/UPY-C_GEN_24.pdf, Height=0.9mm, Lead Free=Yes, Material=Ceramic, Mouser Description="Cap Ceramic 2.2uF 16V X7R 10% Pad SMD 0603 125C Automotive T/R", Octopart=https://octopart.com/cc0603krx7r7bb225-yageo-67146440, RoHS=TRUE, Voltage Rating="16 V"
C12 C14 C16 C20: library part CMP-03422-000537-1, "CAP CER 0.1UF 50V X7R 0603", Capacitance="100 nF", Manufacturer=YAGEO, Package=CC0603-DA, Temperature="-55°C to +125°C", Temperature Characteristic=X7R, Temperature Coefficient=15%, Temperature Range High=+125°C, Temperature Range Low=-55°C, Tolerance=0.2, Voltage="50 V", Automotive=No, Category=Cap, ComponentLink2Description=Datasheet, ComponentLink2URL=http://www.yageo.com/documents/recent/UPY-GPHC_X7R_6.3V-to-50V_18.pdf, Device Class L1="Passive Components", Device Class L2=Capacitors, Device Class L3="Ceramic Capacitors", Digikey Description="CAP CER 0.1UF 50V X7R 0603", Footprint Url=http://www.yageo.com/exep/pages/download/literatures/UPY-C_GEN_24.pdf, Height=0.9mm, Lead Free=Yes, Manufacturer Part Number=CC0603MRX7R9BB104, Material=Ceramic, Mouser Description="Cap Ceramic 50V 20% +Tol 20% -Tol X7R 15% TC 0.1uF SMD 0603", Octopart=https://octopart.com/cc0603mrx7r9bb104-yageo-67308423, RoHS=TRUE, Voltage Rating="50 V"
C13: library part CMP-05427-002121-1, "Aluminum Electrolytic Capacitors (Radial Lead Type) AEC-Q200 Qualified 470uF ±20% 50V"
C15: library part CMP-05427-000071-1, "CAP ALUM 220UF 20% 16V SMD", Capacitance=220uF, Case/Package=Radial, ESR (Equivalent Series Resistance)=340mR, Leakage Current=3uA, Max Operating Temperature=105°C, Min Operating Temperature=-55°C, Package Quantity=900, Ripple Current=280mA, Tolerance=20%, Voltage=16V, Construction=Cylindrical, Contact Plating=Tin, Diameter=6.3mm, Height=7.7mm, Height - Seated (Max)=0.315inch, Impedance=340mR, Lead Free="Lead Free", Length=7.7mm, Life (Hours)=2000Hour, Material=Aluminium, Mount="Surface Mount", Number of Pins=8, Packaging="Tape and Reel", Polarity=Polar, Radiation Hardening=No, REACH SVHC="No SVHC", Ripple Current (AC)=280mA, RoHS Compliant=Yes, Series=FK, Termination=SMD/SMT, Voltage Rating=16V, Voltage Rating (DC)=16V, Width=8.3mm
C17 C18 C19: library part CMP-03422-001047-1, "CC0603 1 uF X7R 10.00% 16 V", Capacitance="1 uF", Manufacturer=YAGEO, Package=CC0603-DA, Temperature="-55°C to +125°C", Temperature Characteristic=X7R, Temperature Coefficient=15%, Temperature Range High=+125°C, Temperature Range Low=-55°C, Tolerance=0.1, Voltage="16 V", Automotive=No, Category=Cap, ComponentLink2Description=Datasheet, ComponentLink2URL=http://www.yageo.com/documents/recent/UPY-GPHC_X7R_6.3V-to-50V_18.pdf, Device Class L1="Passive Components", Device Class L2=Capacitors, Device Class L3="Ceramic Capacitors", Footprint Url=http://www.yageo.com/exep/pages/download/literatures/UPY-C_GEN_24.pdf, Height=0.9mm, Lead Free=Yes, Manufacturer Part Number=CC0603KPX7R7BB105, Material=Ceramic, Mouser Description="Cap Ceramic 1uF 16V X7R 10% SMD 0603 125°C Paper T/R", Octopart=https://octopart.com/cc0603kpx7r7bb105-yageo-25629533, RoHS=TRUE, Voltage Rating="16 V"
D1_0 D1_1 D1_2 D1_3 D1_4 D1_5: "TVS Diode (Bi-directional)", Manufacturer_Name=LITTELFUSE, Mouser Part Number=576-SC1103C-01UTG, Arrow Part Number=SC1103C-01UTG, Arrow Price/Stock=null?region=nac, Datasheet Link=https://www.littelfuse.com/media?resourcetype=datasheets&itemid=00ca821d-8080-42f3-aae6-7cab4684d809&filename=littelfuse-tvs-diode-array-sc1103c-01utg-datasheet-1, Height=0.55mm, Manufacturer_Part_Number=SC1103C-01UTG, Mouser Price/Stock=https://www.mouser.co.uk/ProductDetail/Littelfuse/SC1103C-01UTG?qs=Rp5uXu7WBW8S8u%2FopEdSug%3D%3D
D3: library part CMP-02539-000066-1, "DIODE SCHOTTKY 40V 3A DO214AB", Average Rectified Current=3A, Case/Package=SMC, Forward Voltage=500mV, Max Operating Temperature=125°C, Max Repetitive Reverse Voltage (Vrrm)=40V, Max Reverse Current=500uA, Max Surge Current=100A, Min Operating Temperature=-55°C, Package Quantity=3500, Element Configuration=Single, Forward Current=3A, Max Reverse Leakage Current=500uA, Max Reverse Voltage (DC)=40V, Mount="Surface Mount", Number of Pins=2, Packaging="Tape and Reel", Peak Non-Repetitive Surge Current=100A, Radiation Hardening=No, RoHS Compliant=Yes, Series=-
FB1: library part FBMJ2125HS250NT, "FBMJ2125HS250NT", Manufacturer_Name="TAIYO YUDEN", Mouser Part Number=963-FBMJ2125HS250NT, Arrow Part Number=FBMJ2125HS250NT, Arrow Price/Stock=null?region=nac, Datasheet Link=https://mouser.componentsearchengine.com/Datasheets/1/FBMJ2125HS250NT.pdf, Height=1.05mm, Manufacturer_Part_Number=FBMJ2125HS250NT, Mouser Price/Stock=https://www.mouser.co.uk/ProductDetail/TAIYO-YUDEN/FBMJ2125HS250NT?qs=I6KAKw0tg2w%2F7qNkMvc%2FCQ%3D%3D
IC5: "Integrated Circuit", Manufacturer_Name=Microchip, Mouser Part Number=579-ATA6560-GAQW-N, Arrow Part Number=ATA6560-GAQW-N, Arrow Price/Stock=https://www.arrow.com/en/products/ata6560-gaqw-n/microchip-technology?region=nac, Datasheet Link=https://mouser.componentsearchengine.com/Datasheets/1/ATA6560-GAQW-N.pdf, Height=1.75mm, Manufacturer_Part_Number=ATA6560-GAQW-N, Mouser Price/Stock=https://www.mouser.co.uk/ProductDetail/Microchip-Technology-Atmel/ATA6560-GAQW-N?qs=y6ZabgHbY%252By0WOzqKXUktg%3D%3D
J1_Designator1 J1_Designator2 J1_Designator3 J1_Designator4 J1_Designator5 J1_Designator6: library part CMP-2000-07078-2, "CONN HEADER SMD R/A 4POS 2MM", Current Rating=3A, Manufacturer=JST, Temperature="-25°C to +85°C", Temperature Range High=+85°C, Temperature Range Low=-25°C, Voltage Rating=250V, Automotive=No, Category=Conn, ComponentLink2Description=Datasheet, ComponentLink2URL=http://www.jst-mfg.com/product/pdf/eng/ePA-F.pdf, Conn Gender=Male, Conn Orientation="Right Angle", Contact Material=Tin, Device Class L1=Connectors, Device Class L2="Headers and Wire Housings", Device Class L3=unset, Digikey Description="CONN HEADER SMD R/A 4POS 2MM", Height=5.7mm, Lead Free=Yes, Manufacturer Part Number=SM04B-PASS-TBT(LF)(SN), Number Of Contacts=4, Number Of Rows=1, Octopart=https://octopart.com/sm04b-pass-tbt%28lf%29%28sn%29-jst-3990422, Package=SM04B-PASS-TBT(LF)(SN), Pitch=2mm, RoHS=TRUE
J3: library part CMP-1024-00363-1, "0.025\" SQ Post Header, Through-hole, Vertical, -55 to 125 degC, 2.54 mm Pitch, 5-Pin, Male, RoHS", Manufacturer=Samtec, Temperature Range="-55 to 125 degC", ComponentLink1Description="Manufacturer URL", ComponentLink1URL=http://www.samtec.com, ComponentLink2Description=Datasheet, ComponentLink2URL=http://www.samtec.com/documents/webfiles/pdf/TSW_TH.PDF, ComponentLink3Description="Package Specification", ComponentLink3URL=http://www.samtec.com/documents/webfiles/cpdf/TSW-XXX-XX-XXX-X-XX-XXX-MKT.pdf, DatasheetVersion=F-214, Mounting Technology=Through-hole, Orientation=Vertical, PackageDescription=".025[0.64] SQ. Post Terminal Strip Assembly", PackageReference=TSW-105-05-X-S, PackageVersion="DM, 8/1988", PartNumber=TSW-105-05-G-S, Pitch="2.54 mm", RoHS=True
L?: "Inductor", Manufacturer_Name=Bourns, Mouser Part Number=652-SRR1260-101M, Arrow Part Number=SRR1260-101M, Arrow Price/Stock=https://www.arrow.com/en/products/srr1260-101m/bourns?utm_currency=USD&region=nac, Datasheet Link=https://componentsearchengine.com/Datasheets/1/SRR1260-101M.pdf, Height=6.5mm, Manufacturer_Part_Number=SRR1260-101M, Mouser Price/Stock=https://www.mouser.co.uk/ProductDetail/Bourns/SRR1260-101M?qs=uD%2FoUDWqfvQozr%2Ff4%252BPuSQ%3D%3D
LED1: library part CMP-44529-000040-1, "LED GREEN CLEAR 2SMD", Case Code (Imperial)=0603, Case Code (Metric)=1608, Color=Green, Forward Voltage=2.65V, Lens Color=Colorless, Test Current=2mA, Case/Package=0603, Dominant Wavelength=525nm, Height=0.75mm, Length=1.6mm, Lens Transparency=Clear, Luminous Intensity=50mcd, Mount="Surface Mount", Packaging="Cut Tape", Viewing Angle=120°, Width=0.8mm
Q1: library part CMP-07173-000101-1, "MOSFET N-CH 50V 220MA SOT-23", Case/Package=SOT-23, Continuous Drain Current (ID)=220mA, Drain to Source Breakdown Voltage=50V, Drain to Source Resistance=3.5R, Gate to Source Voltage (Vgs)=20V, Input Capacitance=27pF, Max Operating Temperature=150°C, Max Power Dissipation=360mW, Min Operating Temperature=-55°C, On-State Resistance=6R, Package Quantity=1, Threshold Voltage=1.3V, Contact Plating=Tin, Current Rating=220mA, Drain to Source Voltage (Vdss)=50V, Dual Supply Voltage=50V, Element Configuration=Single, Fall Time=9ns, Height=0.93mm, Lead Free="Lead Free", Length=2.92mm, Mount="Surface Mount", Nominal Vgs=1.3V, Number of Elements=1, Number of Pins=3, Packaging="Tape and Reel", Power Dissipation=360mW, Radiation Hardening=No, Rds On Max=3.5R, REACH SVHC="No SVHC", Rise Time=9ns, Termination=SMD/SMT, Turn-Off Delay Time=20ns, Turn-On Delay Time=2.5ns, Voltage Rating (DC)=50V, Weight=0.03g, Width=1.3mm
R1 R3: library part CMP-2100-03667-1, "Chip Resistor, 0 Ohm, +/- 5%, 0.1 W, -55 to 155 degC, 0603 (1608 Metric), RoHS, Tape and Reel", Case Code (Imperial)=0603, Case Code (Metric)=1608, Manufacturer=Yageo, Max Operating Temperature=155degC, Min Operating Temperature=-55degC, Package Description="2-Pin Surface Mount Device, Body 1.6 x 0.8 mm", Package Quantity=5000, Power Rating=100mW, Resistance=0mOhm, Temperature Coefficient=200ppm/degreesC, Tolerance=5%, Voltage Rating=50V, Case/Package=0603, Composition=ThickFilm, Contact Plating=Tin, Datasheet URL=http://www.yageo.com/NewPortal/yageodocoutput?fileName=/pdf/R-Chip/PYu-RC_Group_51_RoHS_L_5.pdf, Datasheet Version="Rev. 5, 10/2016", Depth=0.8mm, Height=0.45mm, Lead Free=LeadFree, Length=1.6mm, Manufacturer URL=http://www.yageo.com/, Military Standard=Not, Number of Pins=2, Package Reference=0603, Packaging=TapeandReel, Radiation Hardening=No, REACH SVHC=NoSVHC, RoHSCompliant=true, Termination=SMD/SMT, Voltage Rating (DC)=50V, Width=0.8mm
R2 R4 R7: library part CMP-2100-03664-2, "RES 10K OHM 1% 1/10W 0603", Case Code (Imperial)=0603, Case Code (Metric)=1608, Max Operating Temperature=155°C, Max Power Dissipation=100mW, Min Operating Temperature=-55°C, Resistance=10kR, Resistance Tolerance=1%, Resistor Type="Thick Film", Temperature Coefficient=100ppm/°C, Voltage Rating=75V, Voltage Rating (DC)=50V, Case/Package=0603, Construction=Rectangular, Depth=0.8mm, Features="Moisture Resistant", Height=0.45mm, Lead Free="Lead Free", Lead Pitch=0.3mm, Length=1.6mm, Military Standard=Not, Number of Pins=2, Number of Terminations=2, Packaging="Tape and Reel", Power Rating=100mW, RoHS Compliant=Yes, Series=RC, Size Code=0603, Termination=SMD/SMT, Tolerance=1%, Weight=7.1E-05oz, Width=0.8mm
R5: library part CMP-1659-00020-2, "Chip Resistor, 330 Ohm, +/- 1%, 0.1 W, -55 to 155 degC, 0603 (1608 Metric), RoHS, Tape and Reel", Capacitance="47 uF", Case Code (Imperial)=2917, Case Code (Metric)=7343, Max Operating Temperature=125degC, Min Operating Temperature=-55degC, Package Quantity=500, Tolerance=10%, Voltage Rating="16 V", Case/Package=2917, ComponentLink1Description="Manufacturer URL", ComponentLink1URL=http://www.yageo.com/, ComponentLink2Description=Datasheet, ComponentLink2URL=http://www.yageo.com/documents/recent/PYu-RC_Group_51_RoHS_L_04.pdf, DatasheetVersion="Rev. 4, 02/2016", ESR="800 mohm", Height="3.1 mm", Length="7.3 mm", Mount="Surface Mount", PackageDescription="2-Pin Surface Mount Device, Body 1.6 x 0.8 mm", PackageReference=0603, Packaging="Tape and Reel", Pins=2, Radiation Hardening=No, REACH SVHC="No SVHC", RoHSCompliant=True, Voltage Rating (DC)="16 V", Width="4.3 mm"
R6: library part CMP-1659-00034-1, "Chip Resistor, 120 Ohm, +/- 1%, 100 mW, -55 to 155 degC, 0603 (1608 Metric), RoHS, Tape and Reel", Case Code (Imperial)=0603, Case Code (Metric)=1608, Colour=Orange, Forward Current="20 mA", Forward Voltage="2.1 V", Max Operating Temperature="100 degC", Min Operating Temperature="-40 degC", Package Quantity=3000, Power Rating="90 mW", Case\Package=0603, ComponentLink1Description="Manufacturer URL", ComponentLink1URL=http://www.yageo.com/, ComponentLink2Description=Datasheet, ComponentLink2URL=http://www.yageo.com/documents/recent/PYu-RC_Group_51_RoHS_L_04.pdf, DatasheetVersion="Rev. 4, 02/2016", Height="0.6 mm", Illumination Colour=Orange, Length="1.6 mm", Lens Style=Diffused, Luminous Intensity="80 mcd", Mount="Surface Mount", Nominal Vf="2.1 V", Nominal Wavelength="606 nm", PackageDescription="2-Pin Surface Mount Device, Body 1.6 x 0.8 mm", PackageReference=0603, Packaging="Tape and Reel", Pins=2, Radiation Hardening=No, REACH SVHC=Unknown, RoHSCompliant=true, Viewing Angle="160 degrees", Width="0.8 mm"
R8_0 R8_1 R8_2 R8_3 R8_4 R8_5: library part CMP-2000-04016-1, Manufacturer=Yageo, Part Number=RC0603FR-07340RL
U1: library part CMP-0243-00093-2, "ARM Cortex-M4 32-bit MCU+FPU, 210 DMIPS, 1024 kB Flash, 192 kB Internal RAM, 51 I/Os, 64-pin LQFP, -40 to 105 degC, Tray", I/Os (High Current)=51, Manufacturer=STMicroelectronics, Operating Frequency(F) (Processor speed) (MHz)=168, Supply Voltage(Vcc) max (V)=3.6, Supply Voltage(Vcc) min (V)=1.8, ComponentLink1Description="Manufacturer URL", ComponentLink1URL=http://www.st.com/web/en/home.html, ComponentLink2Description=Datasheet, ComponentLink2URL=http://www.st.com/st-web-ui/static/active/en/resource/technical/document/datasheet/DM00037051.pdf, ComponentLink3Description="Package Specification", ComponentLink3URL=http://www.st.com/st-web-ui/static/active/en/resource/technical/document/datasheet/DM00037051.pdf, Core="ARM Cortex-M4", D/A Converter=2x12-bit, DatasheetVersion="Rev. 4", FLASH Size (Prog) (kB)=1024, Internal RAM Size (kB)=192, Mounting Technology="Surface Mount", PackageDescription="64-Pin Low Profile Quad Flat Package, 10 x 10 mm Body, 0.5 mm Pitch", PackageReference=LQFP64, PackageVersion="Rev. 4, 06/2013", Packing=Tray, PartNumber=STM32F405RGT7
U2: library part CMP-0069-00269-3, "SIMPLE SWITCHER® Power Converter 150 KHz 3A Step-Down Voltage Regulator, 5-pin TO-263, Pb-Free", Manufacturer="Texas Instruments", PackageTopMarking="NSUZXYTTE#*LM2596S*-5.0 P+", PowerWise=N, Code_JEDEC=MO-169-AB, ComponentLink1Description="Datasheet URL", ComponentLink1URL=http://www.ti.com/general/docs/lit/getliterature.tsp?genericPartNumber=LM2596&fileType=pdf, CompType=Switcher, PackageDescription="TO-263, Molded, .400 x .390 x .180in, 5 Lead, .067in Pitch, Surface Mount", PackageReference=KTT0005B, PinCount=5, RoHS=Y
U3: library part CMP-2000-07604-2, "IC REG LINEAR 3.3V 300MA SOT23-5", Case/Package=SOT-23-5, Dropout Voltage=380mV, Max Input Voltage=5.5V, Max Operating Temperature=125°C, Max Output Current=300mA, Min Input Voltage=2.5V, Min Operating Temperature=-40°C, Nominal Output Voltage=3.3V, Operating Supply Current=42uA, Power Supply Rejection Ratio (PSRR)=60dB, Quiescent Current=38uA, Accuracy=3%, Height=1.1mm, Length=2.9mm, Mount="Surface Mount", Number of Outputs=1, Number of Pins=5, Output Current=300mA, Output Type=Fixed, Output Voltage=3.3V, Packaging="Tape and Reel", REACH SVHC="No SVHC", Width=1.6mm
U4: library part CMP-0367-00131-2, "30 ppm / degC Drift, 3.9 uA Voltage Reference, -40 to 125 degC, 3-pin SOT-23 (DBZ), Green (RoHS & no Sb/Br)", Manufacturer="Texas Instruments", Rating=Catalog, Temp Coeff(Max)(ppm/ degree C)=30, Temp Coeff(Typ)(ppm/ degree C)=8, Code_JEDEC=TO-236, ComponentLink1Description="Manufacturer URL", ComponentLink1URL=http://www.ti.com/, ComponentLink2Description=Datasheet, ComponentLink2URL=http://www.ti.com/general/docs/lit/getliterature.tsp?genericPartNumber=REF3325&fileType=pdf, ComponentLink3Description="Package Specification", ComponentLink3URL=http://www.ti.com/litv/pdf/mpds108a, DatasheetVersion=SBOS392A, Eco-Plan="Green (RoHS & no Sb/Br)", Initial Accuracy @ 25/deg C(%)=0.15, Iout/Iz(Max)(mA)=5, Iq(Max)(uA)=5, Mounting Technology="Surface Mount", PackageDescription="3-Pin Plastic Small Outline, Body 2.92 x 1.3 mm, Pitch 0.95 mm", PackageReference=DBZ0003A, PackageVersion=4203227/B, PartNumber=REF3325AIDBZR, SubFamily="Series Voltage Reference", VI(Max)(V)=5.5, VI(Min)(V)=2.66, VO(V)=2.5
X1: library part CMP-2000-05033-1, "AA-8.000MALV-T", Case Height=1.3mm, Case Length=5mm, Case Width=3.2mm, Frequency=8MHz, Frequency Stability=30PPM, Load Capacitance=18pF, Manufacturer=ABRACON, Operating Temperature Range=-40Cto+85C, Package / Case=5mmx3.2mm, Package Description="2-Pin Surface Mount Device, Body 5 x 3.2 mm", Package Reference=ABM3-2, Tolerance=20PPM, Brand=ABRACON, Datasheet URL=http://www.farnell.com/datasheets/1754353.pdf, Datasheet Version=Sep-13, Dimensions=3.2mmWx5mmLx1.3mmH, ESR=140Ohms, Factory Pack Quantity=1000, Manufacturer URL=http://www.abracon.com/, Mounting Style=SMD/SMT, Package URL=http://www.abracon.com/Support/PackageDrawing/Resonators/ABM3.PDF, Packaging=Reel, Product Category=Crystals, RoHS=Details, Series=ABM3, Termination Style=SMD/SMT, Type=MiniatureCeramicCrystal
C11_0 C11_1 C11_2 C11_3 C11_4 C11_5: SimulationGenericComponent=True

## Free pads (board coordinates)
  round 236 hole 126: HOLE1(2095,3505) HOLE2(4375,1825)

## Via types
v1: diameter 18, hole 8, Signal to Bottom Ground, 83 vias

## Nets (pads, with @x,y where several pads share a name; then routed paths per layer and width w, separated by ;. In a path a pad name is that pad's centre, name@x,y a point inside that pad or via, vN(x,y) a via of type N, cw(c..) or ccw(c..) an arc to the next point about the centre after c; other vN are vias at no path point)
+2V5: +2.5V.1 C2V5_Designator1.1 C2V5_Designator2.1 C2V5_Designator3.1 C2V5_Designator4.1 C2V5_Designator5.1 C2V5_Designator6.1 C20.1 J1_Designator1.2 J1_Designator2.2 J1_Designator3.2 J1_Designator4.2 J1_Designator5.2 J1_Designator6.2 U4.2 | length 2654.8
  Signal w20: v1(2005,3040) 2005,3047.44 2038.03,3080.47 C20.1 ; v1(2100,3165) 2100,3243.99 2240,3383.99 2240,3450 2335.41,3545.41 2335.41,3549.84 2350,3564.43 +2.5V.1 ; v1(2115,3050) 2142.6,3077.6 U4.2 ; v1(2630,1800) J1_Designator1.2@2630,2071.18 ; v1(3185,1800) 3185,2055.82 J1_Designator2.2@3190,2060.82 ; v1(3740,1790) 3740.63,1790.63 J1_Designator3.2 ; J1_Designator6.2@4095,3340.63 4364.37,3340.63 v1(4365,3340) ; J1_Designator4.2 4419.37,2255.63 v1(4420,2255) ; J1_Designator5.2 4134.41,2805 v1(4410,2805)
  Bottom Ground w20: v1(2630,1800) C2V5_Designator3.1 ; v1(3185,1800) C2V5_Designator2.1 ; v1(3740,1790) C2V5_Designator5.1 ; v1(4365,3340) 4370,3345 C2V5_Designator6.1 ; C2V5_Designator4.1 4405.24,2849.02 4405.24,2809.76 v1(4410,2805) ; v1(4420,2255) C2V5_Designator1.1
+5: +5V.1 C5V_Designator1.1 C5V_Designator2.1 C5V_Designator3.1 C5V_Designator4.1 C5V_Designator5.1 C5V_Designator6.1 C12.1 C15.2 C16.1 C17.1 C19.1 IC5.3 J1_Designator1.1 J1_Designator2.1 J1_Designator3.1 J1_Designator4.1 J1_Designator5.1 J1_Designator6.1 L?.2 U2.4 U3.1 U3.3 U4.1 | length 3670.8
  Signal w20: U2.4 2098.07,2221.1 2184.17,2135 v1(2250,2135) ; L?.2 2250,2935.94 v1(2250,2985) ; C17.1 v1(2261,3240) ; U4.1 2267.76,3167.24 v1(2270,3165) ; v1(2268.74,3090.16) 2270.08,3088.82 U3.1 ; U3.3 2448.82,3088.82 v1(2450,3090) ; +5V.1@2467.49,3572.49 2429.28,3534.29 2429.28,3255.72 v1(2475,3210) ; v1(2478.49,3130) 2478.97,3129.53 C16.1 ; v1(2550,1965) 2551.89,1966.89 J1_Designator1.1 ; v1(2600,2985) 2600.47,2984.53 C12.1 ; v1(2610,3171.51) 2610.58,3171.51 2653.03,3129.06 C19.1 ; C12.1@2661.97,2984.53 2722.44,3045 C15.2 ; v1(3105,1975) J1_Designator2.1@3105,2058.31 ; IC5.3 3651,3332 3651,3361 3795,3505 3909.55,3505 3940.34,3535.8 4410,3535.8 ; J1_Designator3.1 3661.89,1978.11 v1(3665,1975) ; v1(4100,3215) 4100,3252.2 4109.69,3261.89 J1_Designator6.1 ; v1(4115,2215) 4115,2186.57 4124.69,2176.89 J1_Designator4.1 ; J1_Designator6.1@4119.96,3261.89 4426.89,3261.89 4479,3314 4479,3466 4410,3535 ; J1_Designator5.1 4163.46,2721.85 4173.15,2712.17 4173.15,2676.85 v1(4175,2675)
  Bottom Ground w8: C5V_Designator3.1 v1(2550,1965)
  Bottom Ground w10: C5V_Designator2.1 v1(3105,1975) ; C5V_Designator5.1 3660,1967.84 3665,1972.84 v1(3665,1975) ; v1(4100,3215) 4102.16,3215 4117.16,3200 C5V_Designator6.1 ; v1(4115,2215) 4117.16,2215 4122.16,2210 C5V_Designator1.1 ; v1(4175,2675) 4176.53,2676.53 4189.71,2676.53 4208.18,2695 C5V_Designator4.1
Blinky: Q1.1 R7.1 U1.54 | length 547.8
  Signal w8: 3650,2945 3685,2980 3780,2980 3815,3015 3815,3060.91
  Signal w10: R7.1 3771.98,3276.72 3764.01,3268.75 3764.01,3267.25 3724.17,3227.41 3724.17,3208.78 3717.79,3202.4 Q1.1 3699.17,3180.83 3815,3065 3815,3060.91
BOOT: R3.2 R4.1 U1.60 | length 365.9
  Signal w10: U1.60 3531.45,2908.85 3531.45,2945.43 3626.02,3040 R3.2 3665.47,3036.06 3694.22,3007.31 3760.33,3007.31 3790,3036.98 R4.1
CAN1_RX: IC5.4 U1.61 | length 503.3
  Signal w10: U1.61 3511.76,2908.85 3511.76,2957.11 3602.88,3048.23 3602.88,3207.88 3692,3297 3694,3297 3701.86,3304.86 3701.86,3313.14 3700,3315 IC5.4
CAN1_TX: IC5.1 U1.62 | length 458.6
  Signal w10: U1.62 3491.73,2962.54 3550,3020.81 IC5.1@3550,3343
CAN2_N: CAN_L.1 IC5.6 R6.1 | length 245.9
  Signal w10: IC5.6 3651.28,3526.28 3651.28,3613.72 R6.1 3762.03,3615 3792.03,3585 CAN_L.1
CAN2_P: CAN_H.1 IC5.7 R6.2 | length 240.9
  Signal w10: CAN_H.1 3462.97,3585 3492.97,3615 R6.2 3598.72,3613.72 3598.72,3526.28 IC5.7
CH0_IN_FLT: C11_0.1 R8_0.2 U1.27 | length 1269.3
  Signal w10: U1.27 3649.21,2474.21 3649.99,2474.99 3649.56,2475.43 3649.56,2508.42 3662.61,2521.48 3853.88,2521.48 3914,2581.59 3914,2849 3962.8,2897.8 3962.8,3158.1 3905.93,3214.97 3905.93,3340.5 3935,3369.57 3955.16,3349.41 R8_0.2
CH1_IN_FLT: C11_1.1 R8_1.2 U1.26 | length 1080.1
  Signal w8: U1.26 3630.26,2470.77 3630.26,2434.19 3649.44,2415
  Signal w10: 3649.44,2415 3719.44,2345 3874.14,2345 3940,2410.86 3940,2845 3954.41,2859.41 R8_1.2 4006.06,2859.41 3980.93,2884.54 3980.93,2960.5 4010,2989.57 C11_1.1
CH2_IN_FLT: C11_2.1 R8_2.2 U1.23 | length 661.9
  Signal w10: U1.23 3570.82,2471.15 3570.82,2434.18 3685,2320 3905.47,2320 4021.06,2435.59 R8_2.2 4025,2496.49 C11_2.1@4015,2506.49
CH3_IN_FLT: C11_3.1 R8_3.2 U1.22 | length 305.3
  Signal w10: C11_3.1@3550.79,2270.7 U1.22 ; C11_3.1 3553.41,2255 3613.19,2195.22 3613.19,2186.81 R8_3.2
CH4_IN_FLT: C11_4.1 R8_4.2 U1.21 | length 393.3
  Signal w8: R8_4.2 3330.59,2173.94 3342.97,2186.32 C11_4.1
  Signal w10: C11_4.1 3344.89,2255 3359.82,2269.92 3359.82,2271.84 3397.97,2310 3410,2310 3531.75,2431.75 3531.75,2440.83 3531.1,2441.48 U1.21
CH5_IN_FLT: C11_5.1 R8_5.2 U1.20 | length 668.2
  Signal w8: C11_5.1 3125,2255 3200,2330 3405,2330 3499.06,2424.06 3499.15,2424.06 3510.69,2435.6 3510.69,2470.77 U1.20
  Signal w10: R8_5.2@2995.59,2163.56 2995.59,2168.94 3002.4,2175.75 3007.78,2175.75 3070.18,2238.16 3070.18,2240.08 3085.11,2255 C11_5.1
D+3.3V: +3.3V.1 C1.1 C2.1 C3.1 C4.1 C18.1 FB1.2 J3.4 LED1.2 R2.2 R3.1 U1.1 U1.19 U1.32 U1.48 U1.64 U3.5 | length 1243.5
  Signal w8: U1.32 3747.64,2477.74 3749.4,2479.5 v1(3792.19,2479.5)
  Signal w10: U1.1 3435.47,2837.64 3442.84,2845 v1(3445,2845) 3445,2847.16 3452.36,2854.53 U1.64 ; v1(3490,2545) 3491.73,2543.27 U1.19 ; v1(3760,2840) 3762.16,2840 3764.53,2837.64 U1.48
  Signal w20: C18.1 2070.21,3250.68 2070.21,3275.21 2160,3365 v1(2180,3365) ; v1(2280,3370) 2300,3350 2300,3220.47 2319.61,3200.87 2319.61,3194.17 U3.5 ; v1(2360,3369.53) 2360,3344.53 2365,3339.53 ; C2.1 v1(2465,3385) ; C3.1 v1(2560,3390) ; C4.1 v1(2660,3390) ; J3.4@3115,3561.14 3120,3556.14 3120,3470 v1(3135,3455) ; FB1.2 3184.4,3244.4 3185,3245 3185,3305 v1(3180,3310) ; R2.2 v1(3305,3325) ; v1(3695,3080) 3697.78,3077.22 3697.78,3066.75 R3.1 ; v1(3792.12,3425.04) 3829.56,3462.48 LED1.2
D+12V: +12V.1 C13.2 C14.1 U2.1 | length 830.9
  Signal w20: U2.1 2306.3,2295.47 C14.1 2440.24,2295.24 2589.76,2295.24 +12V.1 2858.43,2295 C13.2@3047.94,2484.52
extra1: U1.14
extra2: U1.15
extra3: U1.16
extra4: U1.17
GND: C1.2 C2.2 C2V5_Designator1.2 C2V5_Designator2.2 C2V5_Designator3.2 C2V5_Designator4.2 C2V5_Designator5.2 C2V5_Designator6.2 C3.2 C4.2 C5.1 C5V_Designator1.2 C5V_Designator2.2 C5V_Designator3.2 C5V_Designator4.2 C5V_Designator5.2 C5V_Designator6.2 C6.1 C7.2 C8.2 C9.1 C10.1 C11_0.2 C11_1.2 C11_2.2 C11_3.2 C11_4.2 C11_5.2 C12.2 C13.1 C14.2 C15.1 C16.2 C17.2 C18.2 C19.2 C20.2 D1_0.1 D1_1.1 D1_2.1 D1_3.1 D1_4.1 D1_5.1 D3.2 GND.1 IC5.2 IC5.8 J1_Designator1.4 J1_Designator1.5 J1_Designator1.6 J1_Designator2.4 J1_Designator2.5 J1_Designator2.6 J1_Designator3.4 J1_Designator3.5 J1_Designator3.6 J1_Designator4.4 J1_Designator4.5 J1_Designator4.6 J1_Designator5.4 J1_Designator5.5 J1_Designator5.6 J1_Designator6.4 J1_Designator6.5 J1_Designator6.6 J3.2 pad.HOLE1 Q1.2 R1.1 R4.2 R7.2 U1.12 U1.18 U1.63 U2.3 U2.5 U2.6 U3.2 U4.3 | length 1858.5
  Signal w8: R1.1@3223.42,3045.19 3223.42,3095.29 v1(3254.24,3126.11) ; v1(3300,2400) 3435.72,2400 3471.32,2435.6 3471.32,2470.77 U1.18 ; U1.63 3472.05,2862.95 v1(3495,2840)